# Altium PCB SDP_V2.0.PcbDoc (part 1 of 3)
Units mm, origin at the board's own origin, x right, y up, seen from the top; angles counter-clockwise.
Board outline 64 x 80 mm, 4 copper layers (Top Layer, Ground Plane, Power Plane, Bottom Layer), stack 1.466 mm thick; 154 components, 87 nets, 480 pads, 931 vias.
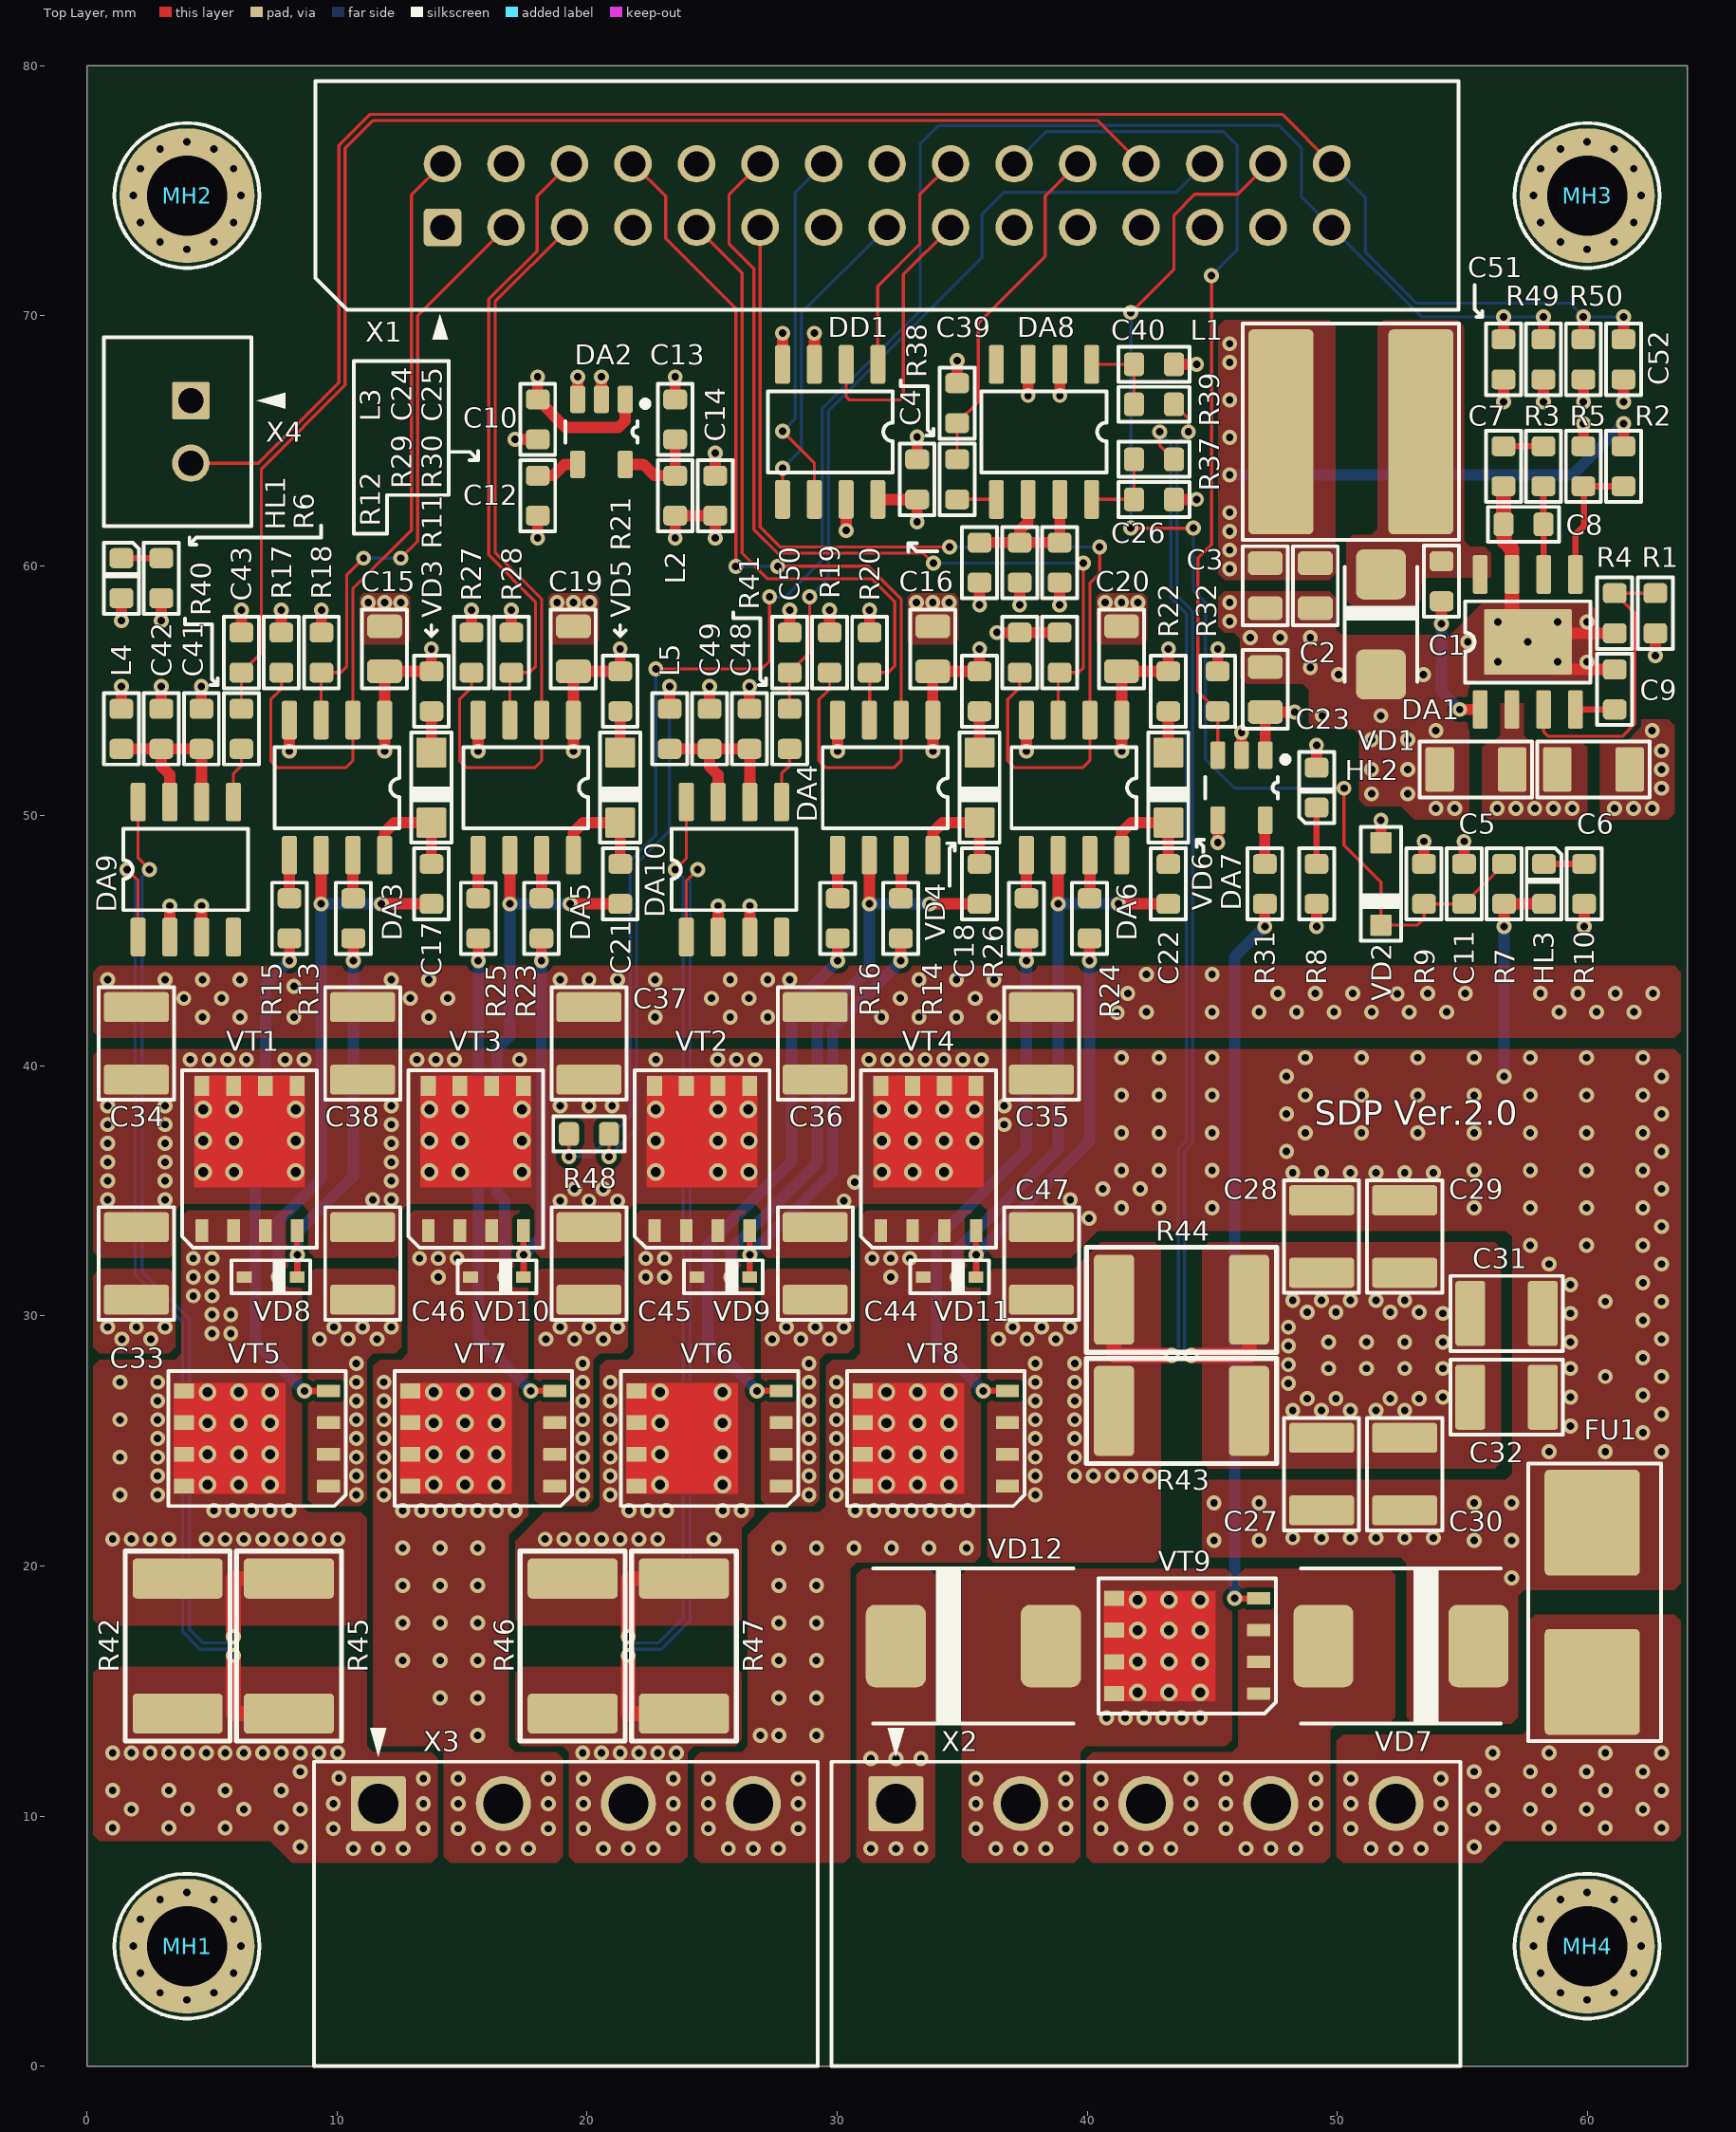
[diagram p0: Top Layer view]
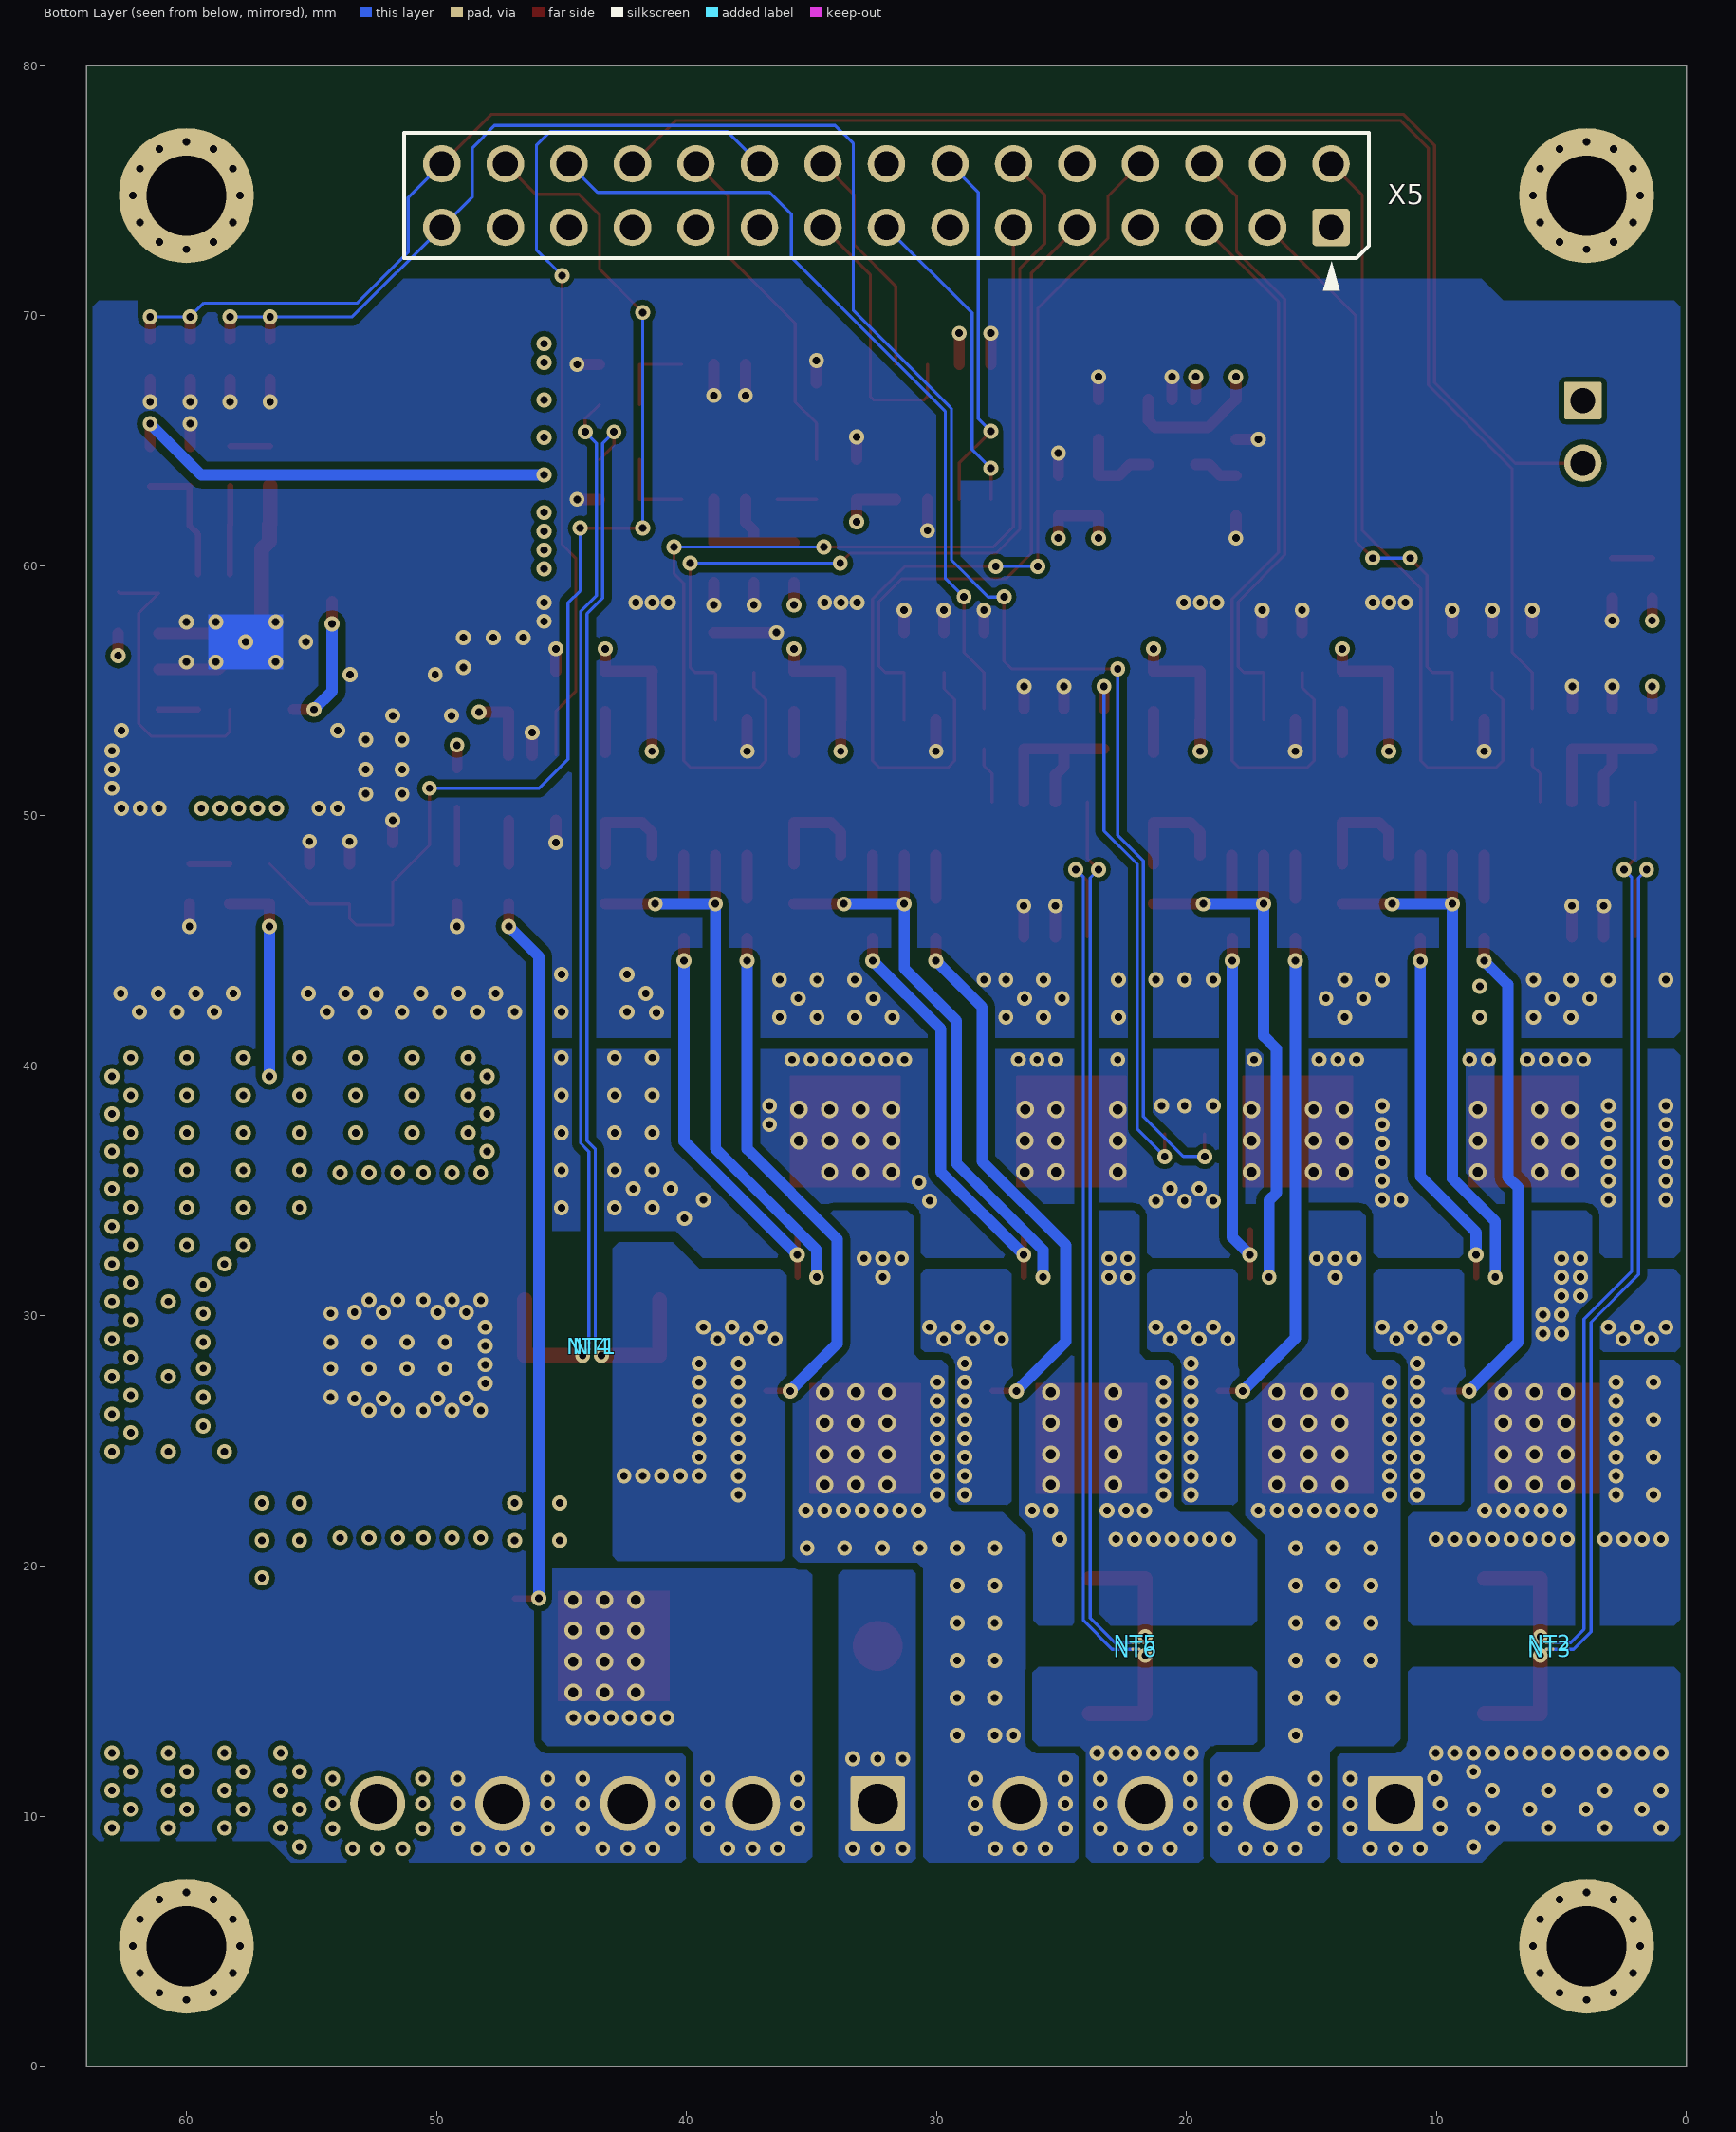
[diagram p1: Bottom Layer view, seen from below]
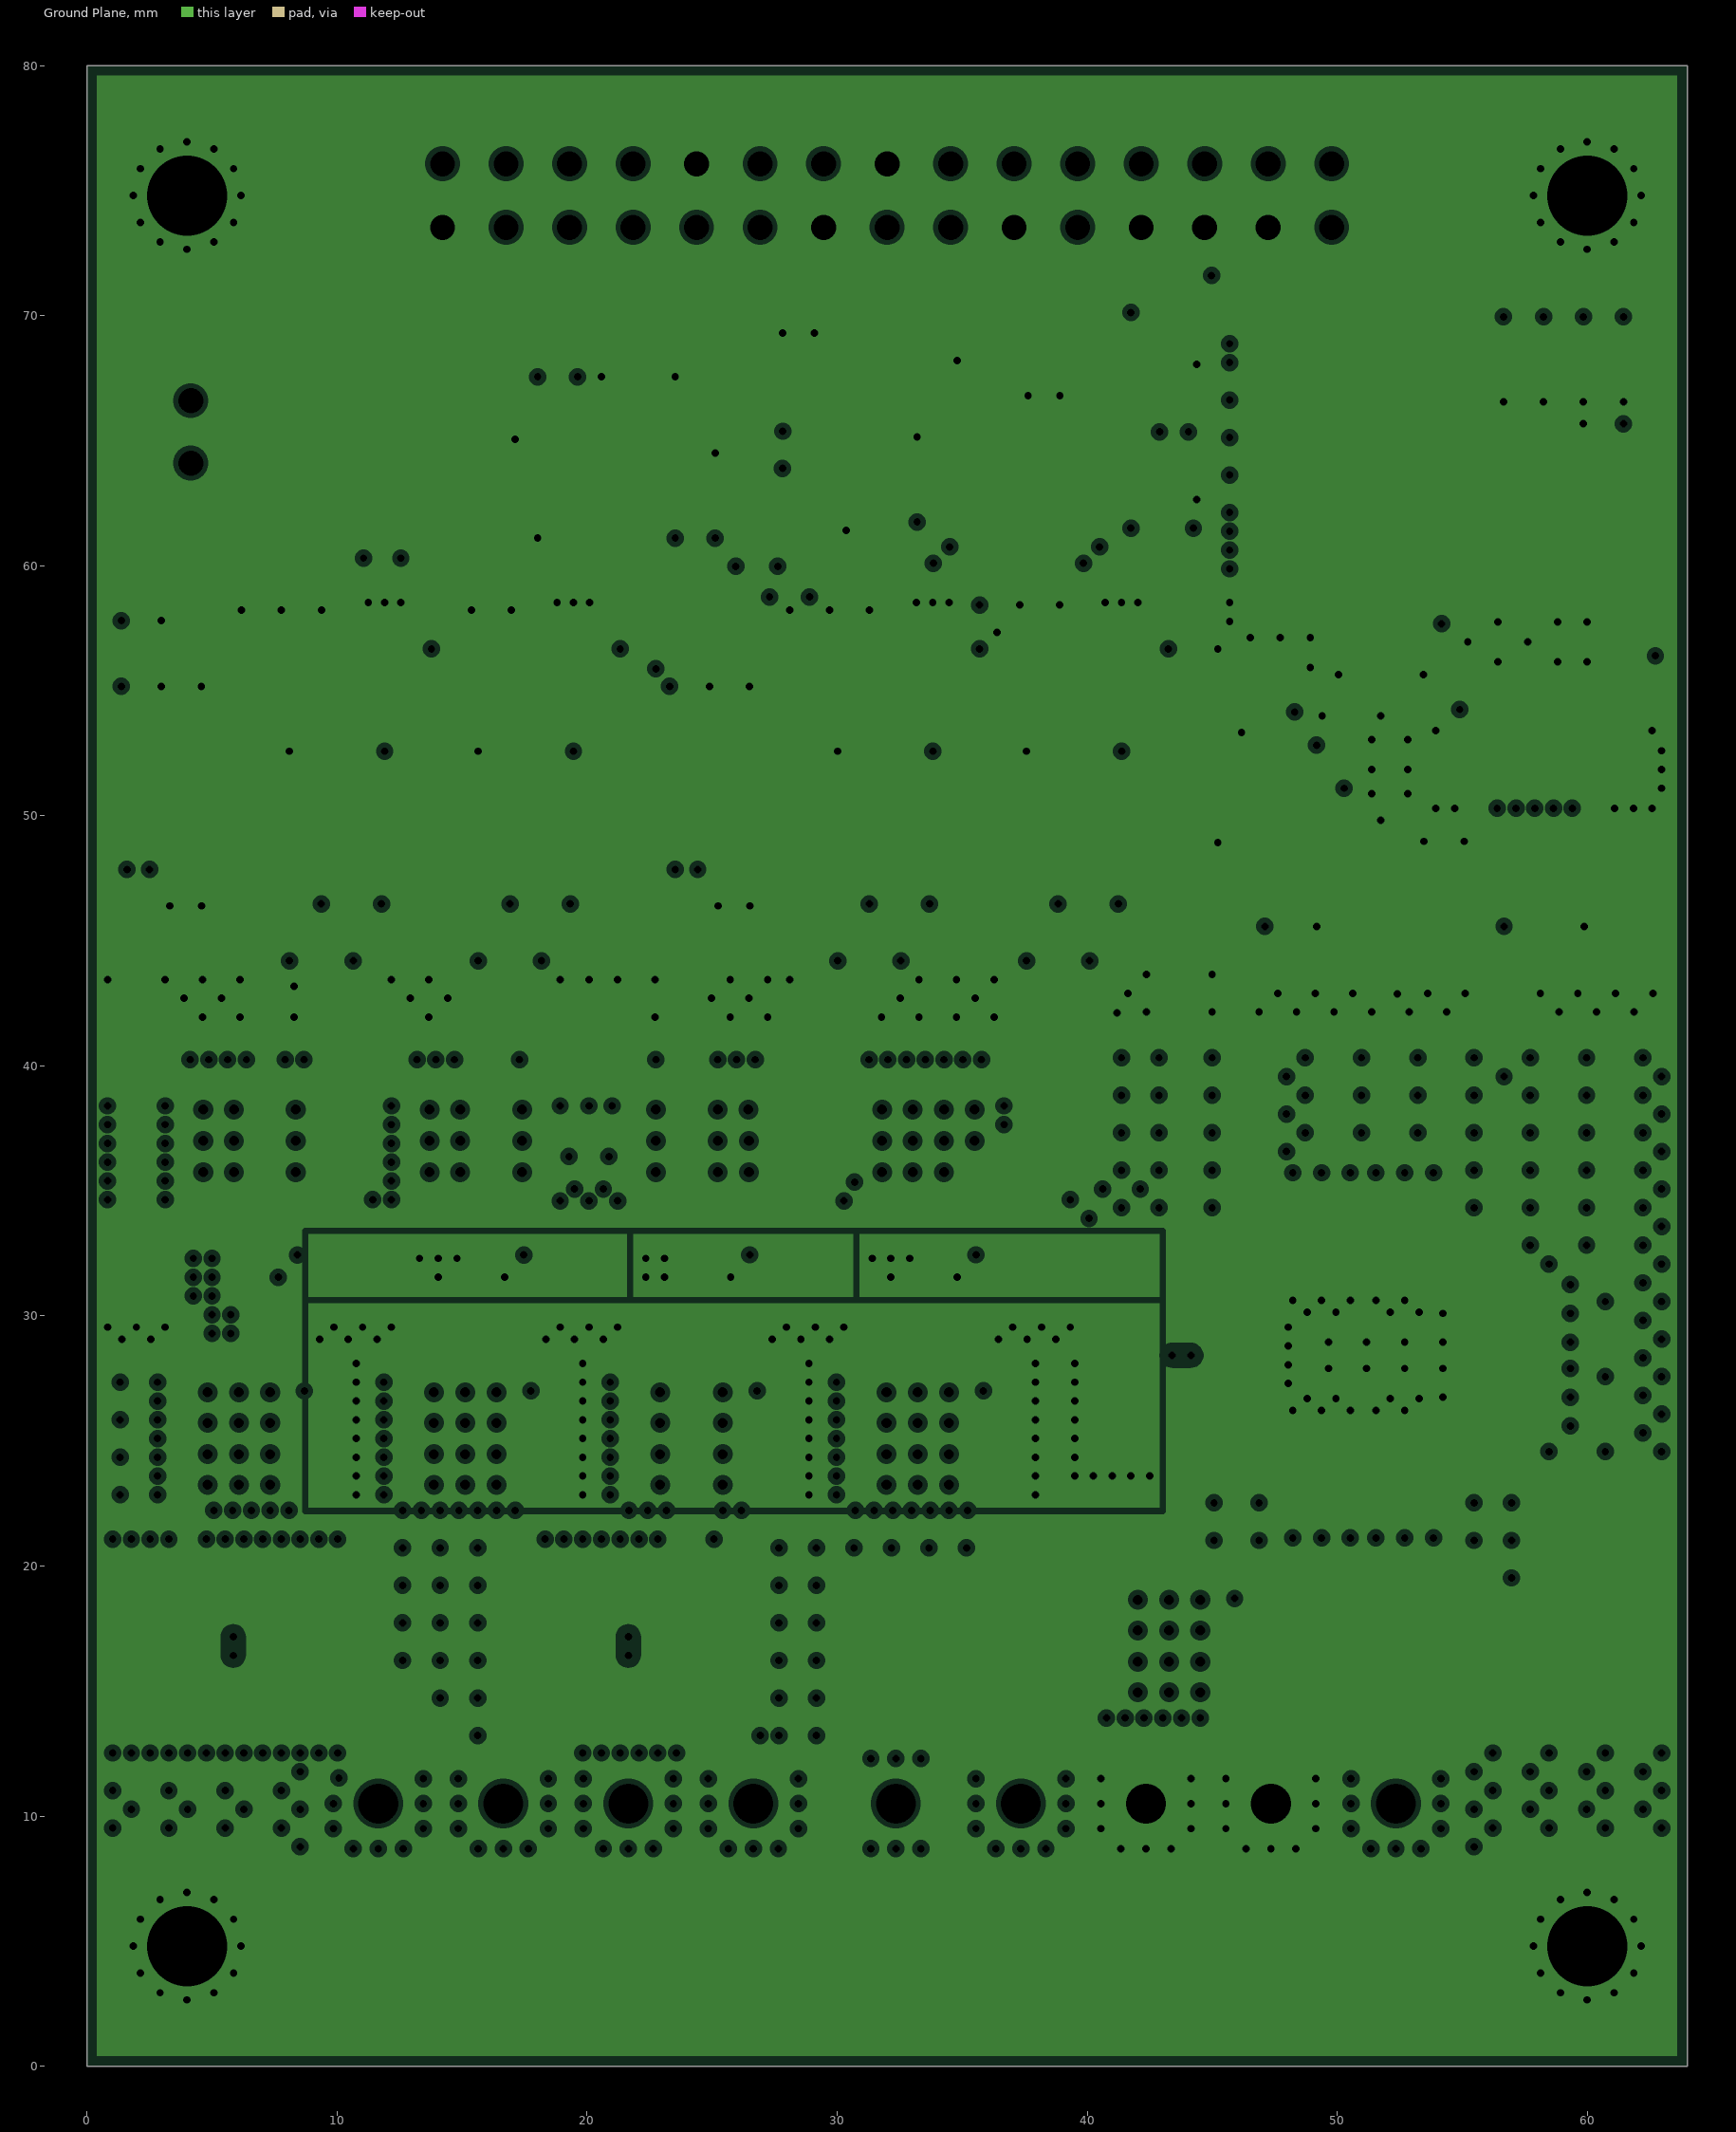
[diagram p2: Ground Plane, clearances drawn from the general rule]
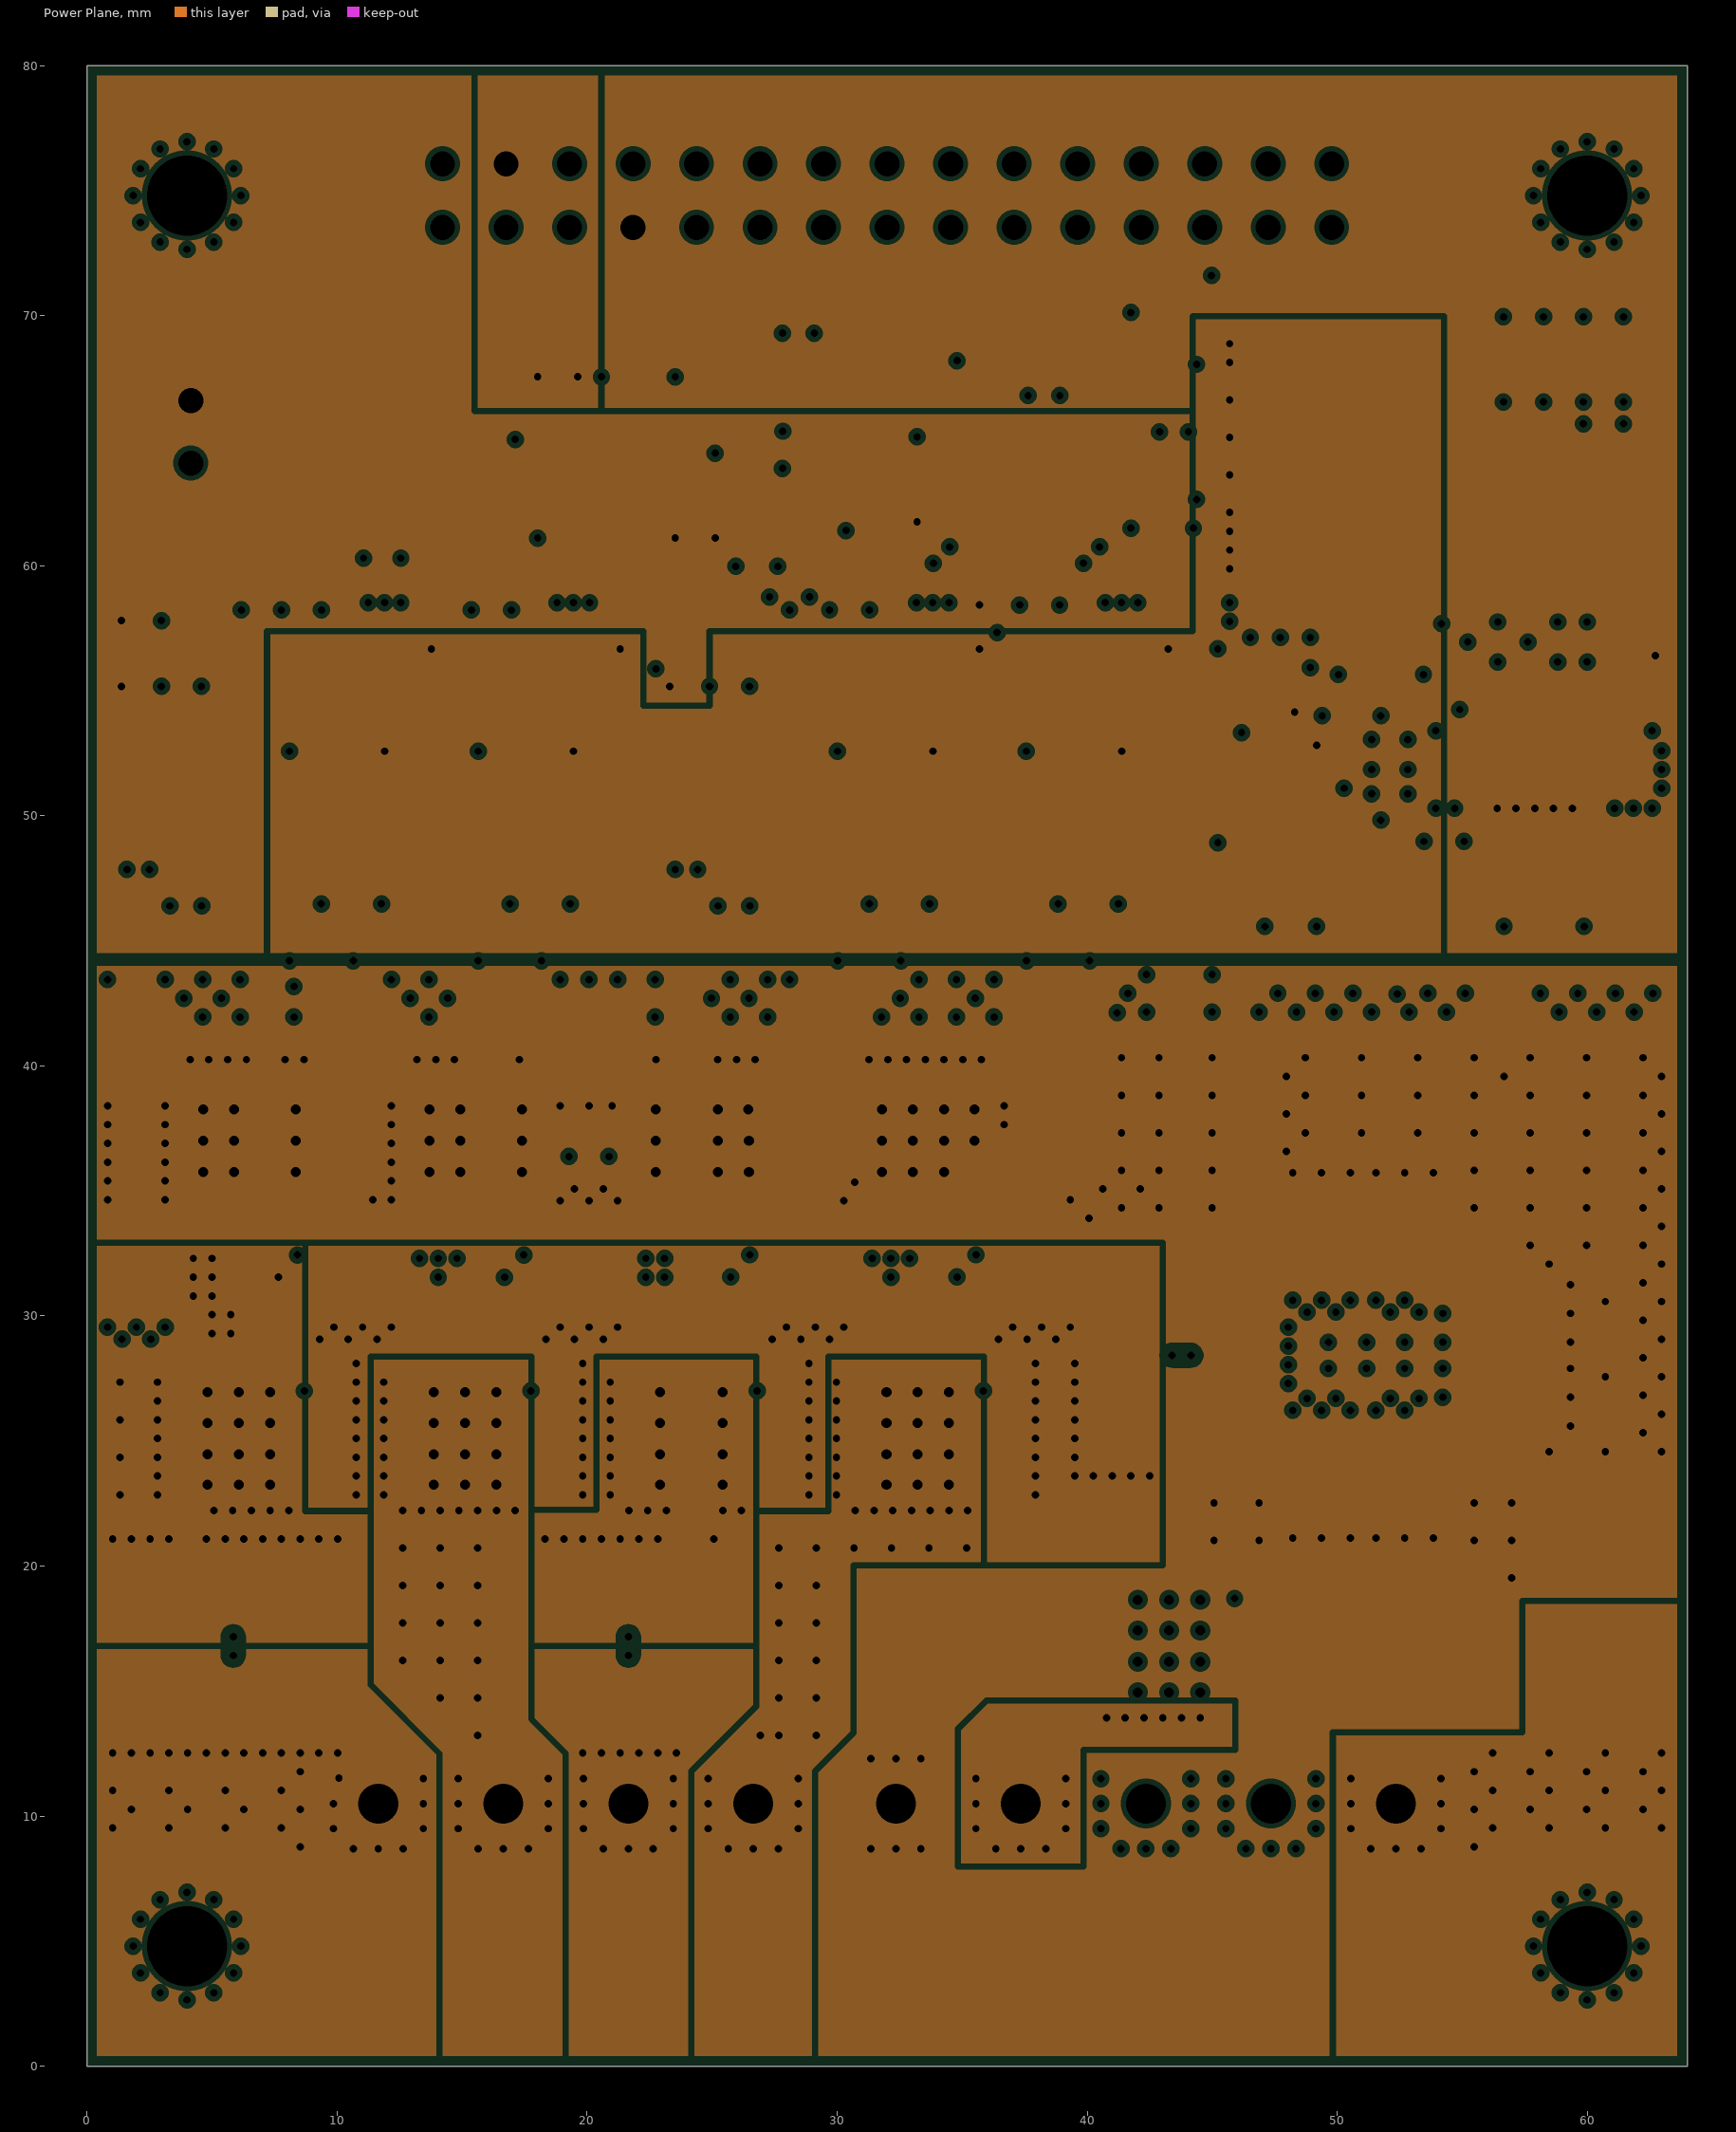
[diagram p3: Power Plane, clearances drawn from the general rule]
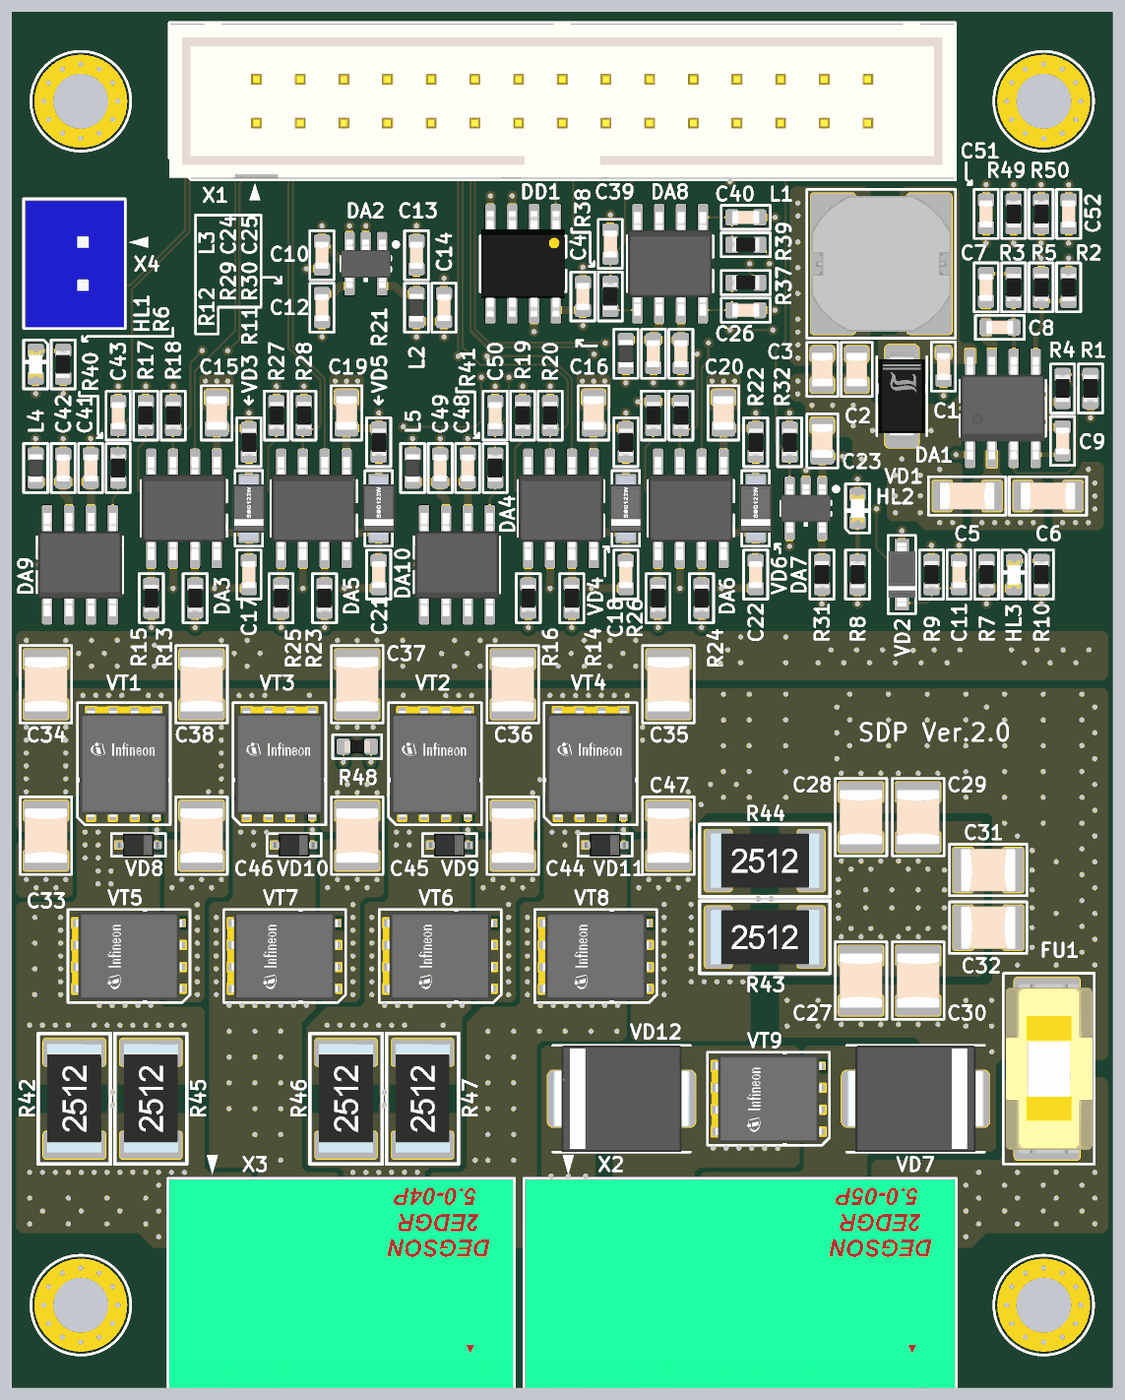
[diagram p5: 3D render of the assembled board from above, using the file's embedded part models]

## Layer stack, top to bottom
Top Solder: solder mask 0.01, Solder Resist, Dk 3.5
Top Layer: signal copper 0.018
Dielectric 1: prepreg 0.115, Dk 5.1
Ground Plane: plane copper 0.018, net (Multiple Nets)
Dielectric 3: core 1.164, Dk 4.6
Power Plane: plane copper 0.018, net (Multiple Nets)
Dielectric 2: prepreg 0.115, Dk 5.1
Bottom Layer: signal copper 0.018
Bottom Solder: solder mask 0.01, Solder Resist, Dk 3.5

## Board outline
0,0 64,0 64,80 0,80

## Design rules (kind name [scope] priority, off if disabled: settings)
Clearance ClearancePolyBot [InPolygon vs OnLayer('Bottom Layer')] p1: gap=0.3 ignorepadtopadclearanceinfootprint=FALSE except(0: Arc-Hole Track-Hole SMDPad-Hole THPad-Hole Via-Hole Fill-Hole Poly-Hole Region-Hole Text-Hole)
Clearance ClearancePoly [InPolygon] p2: gap=0.2 ignorepadtopadclearanceinfootprint=FALSE except(0: Arc-Hole Track-Hole SMDPad-Hole THPad-Hole Via-Hole Fill-Hole Poly-Hole Region-Hole Text-Hole)
Clearance [All] p3: gap=0.125 ignorepadtopadclearanceinfootprint=FALSE except(0: Arc-Hole Track-Hole SMDPad-Hole THPad-Hole Via-Hole Fill-Hole Poly-Hole Region-Hole Text-Hole)
ComponentClearance [All] p1: gap=0 collisioncheckmode=3 verticalgap=0 showdistances=FALSE
Height [All] p1: minheight=0 maxheight=100 prefheight=100
HoleSize [All] p1: absolutevalues=TRUE maxlimit=5 minlimit=0.3 maxpercent=80.000 minpercent=20.000
HoleToHoleClearance [All] p1: gap=0.2 allowstackedmicrovias=TRUE
MinimumAnnularRing MinimumAnnularRing_0.3 [Not IsVia] p1: minimumring=0.2
MinimumSolderMaskSliver [All] p1: minsoldermaskwidth=0.15
PlaneClearance [All] p1: clearance=0.2
PlaneConnect [All] p1: planeconnectstyle=Direct reliefexpansion=0.508 reliefentries=4 reliefconductorwidth=0.254 reliefairgap=0.254
PolygonConnect PolygonConnectVIA [IsVia] p1: connectstyle=Direct reliefconductorwidth=0.254 reliefentries=4 polygonreliefangle="90 Angle" airgapwidth=0.254
PolygonConnect [All] p2: connectstyle=Direct reliefconductorwidth=0.3 reliefentries=4 polygonreliefangle="90 Angle" airgapwidth=0.3
RoutingVias [IsVia] p1: holewidth=0.3 width=0.6 viastyle="Through Hole" minholewidth=0.3 minwidth=0.6 maxholewidth=2 maxwidth=1.5
SilkToSilkClearance [All] p1: silktosilkclearance=0
SilkToSolderMaskClearance [IsPad] p1: minsilkscreentomaskgap=0 clearancetoexposedcopper=TRUE
SolderMaskExpansion [All] p1: expansion=0.05 istentingtop=FALSE
Width Width_Arcs [IsArc] p1: maxlimit=0.254 minlimit=0.1 preferedwidth=0.254
Width [All] p2: maxlimit=10 minlimit=0.125 preferedwidth=0.125
21 further rules are at their usual default settings.

## Classes and differential pairs
component class MOSFETS: C24 C25 C26 C27 C28 C29 C30 C31 C32 C33 C34 C35 C36 C37 C38 C39 C40 C41 C42 C43 C44 C45 C46 C47 C48 C49 C50 C51 C52 DA8 DA9 DA10 FU1 L3 L4 L5 NT1 NT2 NT3 NT4 NT5 NT6 R37 R38 R39 R40 R41 R42 R43 R44 R45 R46 R47 R48 R49 R50 VD7 VD8 VD9 VD10 VD11 VD12 VT1 VT2 VT3 VT4 VT5 VT6 VT7 VT8 VT9 X2 X3 X4
component class DRIVERS: C1 C2 C3 C4 C5 C6 C7 C8 C9 C10 C11 C12 C13 C14 C15 C16 C17 C18 C19 C20 C21 C22 C23 DA1 DA2 DA3 DA4 DA5 DA6 DA7 DD1 HL1 HL2 HL3 L1 L2 MH1 MH2 MH3 MH4 R1 R2 R3 R4 R5 R6 R7 R8 R9 R10 R11 R12 R13 R14 R15 R16 R17 R18 R19 R20 R21 R22 R23 R24 R25 R26 R27 R28 R29 R30 R31 R32 VD1 VD2 VD3 VD4 VD5 VD6 X1 X5

## Components (designator, comment, footprint, x,y, rotation, side; value= is the part's Value field where it differs from the comment)
C1 "0.1uF" C0603N 54.175,59.375 r90 top
C2 "10uF" C0805N 49.125,59.2 r270 top
C3 "10uF" C0805N 47.125,59.2 r90 top
C4 "0.1uF" C0603N 33.2,63.45 r270 top
C5 "10uF" C1206N 55.55,51.85 r0 top
C6 "10uF" C1206N 60.25,51.85 r180 top
C7 "1.5nF" C0603N 56.65,63.975 r90 top
C8 "10pF" C0603N 57.45,61.65 r0 top
C9 "8.2nF" C0603N 61.1,55.05 r270 top
C10 "2.2uF" C0603N 18.025,65.85 r90 top
C11 "0.1uF" C0603N 55.075,47.275 r270 top
C12 "10nF" C0603N 18.025,62.8 r90 top
C13 "2.2uF" C0603N 23.525,65.85 r270 top
C14 "2.2uF" C0603N 25.125,62.8 r270 top
C15 "1uF" C0805N 11.9,56.675 r90 top
C16 "1uF" C0805N 33.825,56.675 r90 top
C17 "0.1uF" C0603N 13.775,47.275 r270 top
C18 "0.1uF" C0603N 35.7,47.275 r270 top
C19 "1uF" C0805N 19.45,56.675 r90 top
C20 "1uF" C0805N 41.375,56.675 r90 top
C21 "0.1uF" C0603N 21.325,47.275 r270 top
C22 "0.1uF" C0603N 43.25,47.275 r270 top
C23 "1uF" C0805N 47.125,55.05 r90 top
C24 "0.1uF" C0603N 37.3,60.125 r90 top
C25 "10nF" C0603N 38.9,60.125 r90 top
C26 "100pF" C0603N 42.675,62.65 r0 top
C27 "4.7uF" C1210N 49.375,23.675 r270 top
C28 "4.7uF" C1210N 49.375,33.175 r90 top
C29 "4.7uF" C1210N 52.7,33.175 r90 top
C30 "4.7uF" C1210N 52.7,23.675 r270 top
C31 "4.7uF" C1210N 56.775,30.1 r0 top
C32 "4.7uF" C1210N 56.775,26.75 r0 top
C33 "4.7uF" C1210N 1.975,32.1 r90 top
C34 "4.7uF" C1210N 1.975,40.9 r270 top
C35 "4.7uF" C1210N 38.175,40.9 r270 top
C36 "4.7uF" C1210N 29.125,40.9 r270 top
C37 "4.7uF" C1210N 20.075,40.9 r270 top
C38 "4.7uF" C1210N 11.025,40.9 r270 top
C39 "2.2nF" C0603N 34.8,66.5 r270 top
C40 "100pF" C0603N 42.675,68.05 r180 top
C41 "0.1uF" C0603N 4.575,53.475 r270 top
C42 "10nF" C0603N 2.975,53.475 r270 top
C43 "2.2nF" C0603N 6.175,56.525 r270 top
C44 "4.7uF" C1210N 29.125,32.1 r90 top
C45 "4.7uF" C1210N 20.075,32.1 r90 top
C46 "4.7uF" C1210N 11.025,32.1 r90 top
C47 "4.7uF" C1210N 38.175,32.1 r90 top
C48 "0.1uF" C0603N 26.5,53.475 r270 top
C49 "10nF" C0603N 24.9,53.475 r270 top
C50 "2.2nF" C0603N 28.1,56.525 r270 top
C51 "0.1uF" C0603N 56.65,68.25 r270 top
C52 "0.1uF" C0603N 61.45,68.25 r270 top
DA1 "TPS54332DDAR" SOIC8-EP 57.625,56.95 r90 top
DA2 "LP2985-33DBVR" "DBV0005A (SOT23-5)" 20.575,65.35 r180 top
DA3 "LM5109BMA/NOPB" D0008A 10,51.125 r270 top
DA4 "LM5109BMA/NOPB" D0008A 31.925,51.125 r270 top
DA5 "LM5109BMA/NOPB" D0008A 17.55,51.125 r270 top
DA6 "LM5109BMA/NOPB" D0008A 39.475,51.125 r270 top
DA7 "UCC27517DBVT" "DBV0005A (SOT23-5)" 46.175,51.125 r180 top
DA8 "INA240A1D" D0008A 38.275,65.35 r270 top
DA9 "INA240A1D" D0008A 3.95,47.85 r90 top
DA10 "INA240A1D" D0008A 25.875,47.85 r90 top
DD1 "M24C01-WMN6P" SOIC8 29.725,65.35 r270 top
FU1 "10A" 0154 60.3,18.55 r270 top
HL1 "GNL-0603GC" LED0603 1.375,59.5 r270 top
HL2 "GNL-0603GC" LED0603 49.175,51.125 r90 top
HL3 "GNL-0603GC" LED0603 58.275,47.275 r270 top
L1 "15uH" SRN8040 50.55,65.35 r180 top
L2 "600 @ 100MHz" FB0603N 23.525,62.8 r270 top
L3 "600 @ 100MHz" FB0603N 35.7,60.125 r90 top
L4 "600 @ 100MHz" FB0603N 1.375,53.475 r270 top
L5 "600 @ 100MHz" FB0603N 23.3,53.475 r270 top
MH1 "MNT_HOLE_PL" MH_3.2_5.4_PLATED_VIA 4,4.8 r180 top
MH2 "MNT_HOLE_PL" MH_3.2_5.4_PLATED_VIA 4,74.8 r180 top
MH3 "MNT_HOLE_PL" MH_3.2_5.4_PLATED_VIA 60,74.8 r180 top
MH4 "MNT_HOLE_PL" MH_3.2_5.4_PLATED_VIA 60,4.8 r180 top
NT1 "NET_TIE" NT_0.125_0.375 43.65,28.8 r270 bottom net-tie
NT2 "NET_TIE" NT_0.125_0.375 5.475,16.925 r180 bottom net-tie
NT3 "NET_TIE" NT_0.125_0.375 5.475,16.675 r0 bottom net-tie
NT4 "NET_TIE" NT_0.125_0.375 43.9,28.8 r270 bottom net-tie
NT5 "NET_TIE" NT_0.125_0.375 22.025,16.925 r0 bottom net-tie
NT6 "NET_TIE" NT_0.125_0.375 22.025,16.675 r180 bottom net-tie
R1 "332k" R0603N 62.725,58.1 r90 top
R2 "10.2k" R0603N 61.45,63.975 r270 top
R3 "9.31k" R0603N 58.25,63.975 r90 top
R4 "31.6k" R0603N 61.1,58.1 r270 top
R5 "732" R0603N 59.85,63.975 r90 top
R6 "1k" R0603N 2.975,59.5 r270 top
R7 "22k" R0603N 56.675,47.275 r90 top
R8 "10k" R0603N 49.175,47.275 r270 top
R9 "1k" R0603N 53.475,47.275 r90 top
R10 "22k" R0603N 59.875,47.275 r270 top
R11 "2.2" R0603N 13.775,54.975 r90 top
R12 "2.2" R0603N 35.7,54.975 r90 top
R13 "2.2" R0603N 10.65,45.9 r90 top
R14 "2.2" R0603N 32.55,45.9 r90 top
R15 "2.2" R0603N 8.1,45.9 r90 top
R16 "2.2" R0603N 30.025,45.9 r90 top
R17 "10k" R0603N 7.775,56.525 r90 top
R18 "10k" R0603N 9.375,56.525 r90 top
R19 "10k" R0603N 29.7,56.525 r90 top
R20 "10k" R0603N 31.3,56.525 r90 top
R21 "2.2" R0603N 21.325,54.975 r90 top
R22 "2.2" R0603N 43.25,54.975 r90 top
R23 "2.2" R0603N 18.175,45.9 r90 top
R24 "2.2" R0603N 40.1,45.9 r90 top
R25 "2.2" R0603N 15.65,45.9 r90 top
R26 "2.2" R0603N 37.575,45.9 r90 top
R27 "10k" R0603N 15.375,56.525 r90 top
R28 "10k" R0603N 16.975,56.525 r90 top
R29 "10k" R0603N 37.3,56.525 r90 top
R30 "10k" R0603N 38.9,56.525 r90 top
R31 "2.2" R0603N 47.106,47.275 r90 top
R32 "10k" R0603N 45.225,54.975 r90 top
R37 "100" R0603N 42.675,64.25 r0 top
R38 "1k" R0603N 34.8,63.45 r270 top
R39 "100" R0603N 42.675,66.45 r0 top
R40 "1k" R0603N 6.175,53.475 r270 top
R41 "1k" R0603N 28.1,53.475 r270 top
R42 "15m" R2512N 3.625,16.8 r90 top
R43 "15m" R2512N 43.775,26.2 r0 top
R44 "15m" R2512N 43.775,30.65 r0 top
R45 "15m" R2512N 8.075,16.8 r90 top
R46 "15m" R2512N 19.425,16.8 r90 top
R47 "15m" R2512N 23.875,16.8 r90 top
R48 "10k" RT0603N 20.075,37.275 r180 top
R49 "10k" R0603N 58.25,68.25 r270 top
R50 "10k" R0603N 59.85,68.25 r270 top
VD1 "B340A-13-F" SMA 51.75,57.65 r270 top
VD2 "MMSZ5230B-7-F" SOD123 51.75,47.275 r90 top
VD3 "PMEG10010ELRX" SOD123W 13.775,51.125 r90 top
VD4 "PMEG10010ELRX" SOD123W 35.7,51.125 r90 top
VD5 "PMEG10010ELRX" SOD123W 21.325,51.125 r90 top
VD6 "PMEG10010ELRX" SOD123W 43.25,51.125 r90 top
VD7 "SM15T68A" SMC 52.55,16.8 r180 top
VD8 "BZX384-B13,115" SOD323 7.35,31.55 r180 top
VD9 "BZX384-B13,115" SOD323 25.45,31.55 r180 top
VD10 "BZX384-B13,115" SOD323 16.4,31.55 r180 top
VD11 "BZX384-B13,115" SOD323 34.5,31.55 r180 top
VD12 "B3100-13-F" SMC 35.45,16.8 r0 top
VT1 "BSC030N08NS5ATMA1" PG-TDSON-8 6.5,36.275 r0 top
VT2 "BSC030N08NS5ATMA1" PG-TDSON-8 24.6,36.275 r0 top
VT3 "BSC030N08NS5ATMA1" PG-TDSON-8 15.55,36.275 r0 top
VT4 "BSC030N08NS5ATMA1" PG-TDSON-8 33.65,36.275 r0 top
VT5 "BSC030N08NS5ATMA1" PG-TDSON-8 6.8,25.1 r90 top
VT6 "BSC030N08NS5ATMA1" PG-TDSON-8 24.9,25.1 r90 top
VT7 "BSC030N08NS5ATMA1" PG-TDSON-8 15.85,25.1 r90 top
VT8 "BSC030N08NS5ATMA1" PG-TDSON-8 33.95,25.1 r90 top
VT9 "BSC030N08NS5ATMA1" PG-TDSON-8 44,16.8 r90 top
X1 "DS1013-30S" 2.54_2X15_HEADER_BOX 32,74.8 r0 top locked
X2 "2EDGR-5.0-05P-14-00A(H)" 2EDGR-5.0-05P-14-00A(H) 42.35,6.05 r0 top locked
X3 "2EDGR-5.0-04P-14-00A(H)" 2EDGR-5.0-04P-14-00A(H) 19.15,6.05 r0 top locked
X4 "B2B-XH-A(LF)(SN)" B2B-XH-A 4.15,65.35 r270 top
X5 "DS1021-2X15SF11-B" 2.54_2X15_HEADER 32,74.8 r0 bottom locked

## Footprints (in the part's own frame and the unit in brackets; to place one, negate y for a bottom-side part, rotate by r counter-clockwise, add the part's x,y. Pads: shape width x height; smd on the part's side, far side on the other; paste and mask are expansions set on the pad)
2.54_2X15_HEADER [mm] "30 pin, 2x15, 2.54 mm pitch Male Header"
  rrect20% 1.5x1.5 hole 1: 1(-17.78,1.27)
  round 1.5 hole 1: 2(-17.78,-1.27) 3(-15.24,1.27) 4(-15.24,-1.27) 5(-12.7,1.27) 6(-12.7,-1.27) 7(-10.16,1.27) 8(-10.16,-1.27) 9(-7.62,1.27) 10(-7.62,-1.27) 11(-5.08,1.27) 12(-5.08,-1.27) 13(-2.54,1.27) 14(-2.54,-1.27) 15(0,1.27) 16(0,-1.27) 17(2.54,1.27) 18(2.54,-1.27) 19(5.08,1.27) 20(5.08,-1.27) 21(7.62,1.27) 22(7.62,-1.27) 23(10.16,1.27) 24(10.16,-1.27) 25(12.7,1.27) 26(12.7,-1.27) 27(15.24,1.27) 28(15.24,-1.27) 29(17.78,1.27) 30(17.78,-1.27)
  silkscreen extent -19.3,-2.5 19.3,3.79, body extent -19.05,-2.54 19.05,2.54, height 8.57
2.54_2X15_HEADER_BOX [mm] "30 pin, 2x15, 2.54 mm pitch Male Box Header"
  rrect20% 1.5x1.5 hole 1: 1(-17.78,-1.27)
  round 1.5 hole 1: 2(-17.78,1.27) 3(-15.24,-1.27) 4(-15.24,1.27) 5(-12.7,-1.27) 6(-12.7,1.27) 7(-10.16,-1.27) 8(-10.16,1.27) 9(-7.62,-1.27) 10(-7.62,1.27) 11(-5.08,-1.27) 12(-5.08,1.27) 13(-2.54,-1.27) 14(-2.54,1.27) 15(0,-1.27) 16(0,1.27) 17(2.54,-1.27) 18(2.54,1.27) 19(5.08,-1.27) 20(5.08,1.27) 21(7.62,-1.27) 22(7.62,1.27) 23(10.16,-1.27) 24(10.16,1.27) 25(12.7,-1.27) 26(12.7,1.27) 27(15.24,-1.27) 28(15.24,1.27) 29(17.78,-1.27) 30(17.78,1.27)
  silkscreen extent -22.86,-5.75 22.86,4.57, body extent -22.86,-4.45 22.86,4.65, height 8.9
2EDGR-5.0-04P-14-00A(H) [mm] "Pluggable terminal block, 5.0mm pitch, angled 90, 4 position"
  rrect10% 2.2x2.2 hole 1.6: 1(-7.5,4.45)
  round 2.2 hole 1.6: 2(-2.5,4.45) 3(2.5,4.45) 4(7.5,4.45)
  silkscreen extent -10.07,-6.05 10.08,7.47, body extent -10,-6.05 10,6.05, height 8.2
2EDGR-5.0-05P-14-00A(H) [mm] "Pluggable terminal block, 5.0mm pitch, angled 90, 5 position"
  rrect10% 2.2x2.2 hole 1.6: 1(-10,4.45)
  round 2.2 hole 1.6: 2(-5,4.45) 3(0,4.45) 4(5,4.45) 5(10,4.45)
  silkscreen extent -12.57,-6.05 12.58,7.47, body extent -12.5,-6.05 12.5,6.05, height 8.2
0154 [mm] "OMNI-BLOCK 154 Fuse and Holder Assembly"
  rrect10% 4.24x3.81 smd: 1(-3.185,-0.1) 2(3.185,-0.1)
  silkscreen extent -5.55,-2.65 5.55,2.65, body extent -4.92,-2.5 4.91,2.53, height 3.81
B2B-XH-A [mm] "Connector Header Through Hole 2 position 0.098\" (2.50mm)"
  rrect10% 1.5x1.5 hole 1: 1(-1.25,0)
  round 1.5 hole 1: 2(1.25,0)
  silkscreen extent -3.77,-3.47 3.77,3.77, body extent -3.7,-3.4 3.7,2.35, height 7
C0603N [mm]
  rrect40% 0.8x0.95 smd: 1(-0.8,0) 2(0.8,0)
  silkscreen extent -1.43,-0.7 1.43,0.7, body extent -0.8,-0.4 0.8,0.4, height 0.81
C0805N [mm]
  rrect40% 0.95x1.4 smd: 1(-0.9,0) 2(0.9,0)
  silkscreen extent -1.58,-0.9 1.58,0.9, body extent -1,-0.62 1,0.63, height 1.26
C1206N [mm]
  rrect20% 1.15x1.8 smd: 1(-1.45,0) 2(1.45,0)
  silkscreen extent -2.25,-1.12 2.25,1.12, body extent -1.6,-0.8 1.6,0.8, height 1.61
C1210N [mm]
  rrect20% 1.2x2.6 smd: 1(-1.45,0) 2(1.45,0)
  silkscreen extent -2.25,-1.5 2.25,1.5, body extent -1.6,-1.25 1.6,1.25, height 2.51
D0008A [mm] "SOIC8 - 1.75 mm max height"
  rrect30% 1.55x0.6 smd: 1(-2.7,1.905) 2(-2.7,0.635) 3(-2.7,-0.635) 4(-2.7,-1.905) 5(2.7,-1.905) 6(2.7,-0.635) 7(2.7,0.635) 8(2.7,1.905)
  silkscreen extent -1.63,-2.5 1.63,2.5, body extent -3.01,-2.45 3.01,2.45, height 1.63
"DBV0005A (SOT23-5)" [mm] "SOT-23, 5 Lead, 1.45mm max height"
  rrect30% 0.6x1.1 smd: 1(-0.95,-1.3) 2(0,-1.3) 3(0.95,-1.3) 4(0.95,1.3) 5(-0.95,1.3)
  silkscreen extent -1.87,-1.24 1.45,0.43, body extent -1.45,-1.4 1.45,1.4, height 1.2
FB0603N [mm] "Ferrite Bead 0603"
  rrect40% 0.8x0.95 smd: 1(-0.8,0) 2(0.8,0)
  silkscreen extent -1.43,-0.7 1.43,0.7, body extent -0.8,-0.4 0.8,0.4, height 0.8
LED0603 [mm] "LED SMD 0603"
  rrect40% 0.8x0.95 smd: 1(-0.8,0) 2(0.8,0)
  silkscreen extent -1.43,-0.7 1.43,0.7, body extent -0.8,-0.4 0.8,0.4, height 0.7
MH_3.2_5.4_PLATED_VIA [mm] "Mounting Hole, 3.2mm/5.4mm dia., Plated, with Via Stiching"
  round 5.4 hole 3.2: 1(0,0)
  silkscreen extent -2.9,-2.9 2.9,2.9
NT_0.125_0.375 [mm] "Net Tie, 0.125mm width, 0.375mm total length"
  round 0.125 smd paste-20 mask-20: 1(-0.125,0) 2(0.125,0)
  Top Layer region: -0.125,0.062 0.125,0.062 0.125,-0.062 -0.125,-0.062
PG-TDSON-8 [mm] "PG-TDSON-8 Package"
  rrect10% 0.5x0.925 smd paste-0.05: 1(-1.905,-2.863) 2(-0.635,-2.863) 3(0.635,-2.863) 4(1.905,-2.863)
  rrect10% 0.6x0.8 smd paste-0.05: 5(1.905,2.925) 6(0.635,2.925) 7(-0.635,2.925) 8(-1.905,2.925)
  Top Layer region: -2.18,-1.13 -2.19,-1.128 -2.198,-1.123 -2.203,-1.115 -2.205,-1.105 -2.205,-1.105 -2.205,2.525 2.205,2.525 2.205,-1.105 2.203,-1.115 2.198,-1.123 2.19,-1.128 2.18,-1.13 2.18,-1.13
  Top Layer region: -2.18,-1.13 -2.19,-1.128 -2.198,-1.123 -2.203,-1.115 -2.205,-1.105 -2.205,-1.105 -2.205,3.3 -2.203,3.31 -2.198,3.318 -2.19,3.323 -2.18,3.325 -2.18,3.325 2.18,3.325 2.19,3.323 2.198,3.318 2.203,3.31 2.205,3.3 2.205,3.3 2.205,-1.105 2.203,-1.115 2.198,-1.123 2.19,-1.128 2.18,-1.13 2.18,-1.13
  silkscreen extent -2.7,-3.55 2.7,3.55, body extent -2.7,-3.07 2.69,3.07, height 1.01
R0603N [mm]
  rrect40% 0.8x0.95 smd: 1(-0.8,0) 2(0.8,0)
  silkscreen extent -1.43,-0.7 1.43,0.7, body extent -0.8,-0.4 0.8,0.4, height 0.45
R2512N [mm] "RCWE2512R120FKEA"
  rrect20% 1.6x3.6 smd: 1(-2.7,0) 2(2.7,0)
  silkscreen extent -3.8,-2.1 3.8,2.1, body extent -3.13,-1.58 3.17,1.58, height 0.82
RT0603N [mm] "NTC Thermistor 0603"
  rrect40% 0.8x0.95 smd: 1(-0.8,0) 2(0.8,0)
  silkscreen extent -1.43,-0.7 1.43,0.7, body extent -0.8,-0.4 0.8,0.4, height 0.8
SMA [mm] "SMA Package"
  rrect30% 2x2 smd: 1(-2,0) 2(2,0)
  silkscreen extent -2.3,-1.45 2.3,1.45, body extent -2.56,-1.35 2.56,1.35, height 1.96
SMC [mm] "SMC Package"
  rrect30% 2.4x3.3 smd: 1(-3.1,0) 2(3.1,0)
  silkscreen extent -4,-3.1 4,3.1, body extent -4,-3.1 4,3.1, height 2.5
SOD123 [mm] "SOD?123 CASE 425?04 ISSUE G"
  rrect10% 0.85x0.85 smd: 1(-1.65,0) 2(1.65,0)
  silkscreen extent -2.27,-0.8 2.27,0.8, body extent -1.85,-0.77 1.85,0.78, height 1.25
SOD123W [mm] "SOD123W (CFP3) Package"
  rrect10% 1.2x1.2 smd: 1(-1.4,0) 2(1.4,0)
  silkscreen extent -2.2,-0.8 2.2,0.8, body extent -1.85,-0.95 1.85,0.95, height 1.1
SOD323 [mm] "SOD323 Package"
  rrect10% 0.59x0.45 smd: 1(-1.06,0) 2(1.06,0)
  silkscreen extent -1.58,-0.67 1.58,0.68, body extent -1.3,-0.67 1.3,0.68, height 1.1
SOIC8 [mm] "SOIC8 - 1.75 mm max height"
  rrect30% 1.55x0.6 smd: 1(-2.7,1.905) 2(-2.7,0.635) 3(-2.7,-0.635) 4(-2.7,-1.905) 5(2.7,-1.905) 6(2.7,-0.635) 7(2.7,0.635) 8(2.7,1.905)
  silkscreen extent -1.63,-2.5 1.63,2.5, body extent -3.07,-2.44 3.07,2.45, height 1.73
SOIC8-EP [mm] "SOIC8 with Exposed Pad"
  rrect30% 1.55x0.6 smd: 1(-2.7,1.905) 2(-2.7,0.635) 3(-2.7,-0.635) 4(-2.7,-1.905) 5(2.7,-1.905) 6(2.7,-0.635) 7(2.7,0.635) 8(2.7,1.905)
  rrect5% 2.62x3.51 smd: 9(0,0)
  silkscreen extent -1.63,-2.5 1.63,2.5, body extent -2.98,-2.45 2.98,2.45, height 1.51
SRN8040 [mm] "SRN8040 Series - Semi-shielded Power Inductors"
  rrect15% 2.6x8.2 smd: 1(-2.8,0) 2(2.8,0)
  silkscreen extent -4.33,-4.33 4.33,4.33, body extent -4.07,-3.95 4.08,3.95, height 4

## Part data
C1 C4 C11 C17 C18 C21 C22 C24 C41 C48 C51 C52: library part CL10B104KB8NNNC, "Конденсатор", Артикул=CL10B104KB8NNNC, Вид монтажа=SMD, Диэлектрик=X7R, Корпус="0603 (1608 Metric)", Напряжение=50V, Номинал=0.1uF, Описание="0.1 µF ±10% 50V Ceramic Capacitor X7R 0603 (1608 Metric)", Производитель="Samsung Electro-Mechanics", Строка для документации=https://mm.digikey.com/Volume0/opasdata/d220001/medias/docus/609/CL10B104KB8NNNC_Spec.pdf, Температурный диапазон="-55°C ~ 125°C", Тип элемента=Конденсатор, Точность=10%
C2 C3: library part CL21A106KAYNNNE, "Конденсатор", Артикул=CL21A106KAYNNNE, Вид монтажа=SMD, Диэлектрик=X5R, Корпус="0805 (2012 Metric)", Напряжение=25V, Номинал=10uF, Описание="10 µF ±10% 25V Ceramic Capacitor X5R 0805 (2012 Metric)", Производитель="Samsung Electro-Mechanics", Строка для документации=https://mm.digikey.com/Volume0/opasdata/d220001/medias/docus/5545/CL21A106KAYNNNE%20Spec.pdf, Температурный диапазон="-55°C ~ 85°C", Тип элемента=Конденсатор, Точность=10%
C5 C6: library part CL31B106KBHNNNE, "Конденсатор", Артикул=CL31B106KBHNNNE, Вид монтажа=SMD, Диэлектрик=X7R, Корпус="1206 (3216 Metric)", Напряжение=50V, Номинал=10uF, Описание="10 µF ±10% 50V Ceramic Capacitor X7R 1206 (3216 Metric)", Производитель="Samsung Electro-Mechanics", Строка для документации=https://mm.digikey.com/Volume0/opasdata/d220001/medias/docus/41/CL31B106KBHNNNE_Spec.pdf, Температурный диапазон="-55°C ~ 125°C", Тип элемента=Конденсатор, Точность=10%
C7: library part CL10B152KB8WPNC, "Конденсатор", Артикул=CL10B152KB8WPNC, Вид монтажа=SMD, Диэлектрик=X7R, Корпус="0603 (1608 Metric)", Напряжение=50V, Номинал=1.5nF, Описание="1500 pF ±10% 50V Ceramic Capacitor X7R 0603 (1608 Metric)", Производитель="Samsung Electro-Mechanics", Строка для документации=https://mm.digikey.com/Volume0/opasdata/d220001/medias/docus/41/CL10B152KB8WPNC_Spec.pdf, Температурный диапазон="-55°C ~ 125°C", Тип элемента=Конденсатор, Точность=10%
C8: library part CL10C100CB8NNNC, "Конденсатор", Артикул=CL10C100CB8NNNC, Вид монтажа=SMD, Диэлектрик=NP0, Корпус="0603 (1608 Metric)", Напряжение=50V, Номинал=10pF, Описание="10 pF ±0.25pF 50V Ceramic Capacitor C0G, NP0 0603 (1608 Metric)", Производитель="Samsung Electro-Mechanics", Строка для документации=https://www.samsungsem.com/resources/file/global/support/product_catalog/MLCC.pdf, Температурный диапазон="-55°C ~ 125°C", Тип элемента=Конденсатор, Точность=±0.25pF
C9: library part CC0603KRX7R9BB822, "Конденсатор", Артикул=CC0603KRX7R9BB822, Вид монтажа=SMD, Диэлектрик=X7R, Корпус="0603 (1608 Metric)", Напряжение=50V, Номинал=8.2nF, Описание="8200 pF ±10% 50V Ceramic Capacitor X7R 0603 (1608 Metric)", Производитель=YAGEO, Строка для документации=https://www.yageo.com/upload/media/product/productsearch/datasheet/mlcc/UPY-GPHC_X7R_6.3V-to-250V_23.pdf, Температурный диапазон="-55°C ~ 125°C", Тип элемента=Конденсатор, Точность=10%
C10 C13 C14: library part CL10A225KO8NNNC, "Конденсатор", Артикул=CL10A225KO8NNNC, Вид монтажа=SMD, Диэлектрик=X5R, Корпус="0603 (1608 Metric)", Напряжение=16V, Номинал=2.2uF, Описание="2.2 µF ±10% 16V Ceramic Capacitor X5R 0603 (1608 Metric)", Производитель="Samsung Electro-Mechanics", Строка для документации=https://mm.digikey.com/Volume0/opasdata/d220001/medias/docus/421/CL10A225KO8NNNC_Spec.pdf, Температурный диапазон="-55°C ~ 85°C", Тип элемента=Конденсатор, Точность=10%
C12 C25 C42 C49: library part CL10B103KB8NNNC, "Конденсатор", Артикул=CL10B103KB8NNNC, Вид монтажа=SMD, Диэлектрик=X7R, Корпус="0603 (1608 Metric)", Напряжение=16V, Номинал=10nF, Описание="10000 pF ±10% 50V Ceramic Capacitor X7R 0603 (1608 Metric)", Производитель="Samsung Electro-Mechanics", Строка для документации=https://mm.digikey.com/Volume0/opasdata/d220001/medias/docus/609/CL10B103KB8NNNC_Spec.pdf, Температурный диапазон="-55°C ~ 125°C", Тип элемента=Конденсатор, Точность=10%
C15 C16 C19 C20 C23: library part CL21B105KAFNNNE, "Конденсатор", Артикул=CL21B105KAFNNNE, Вид монтажа=SMD, Диэлектрик=X7R, Корпус="0805 (2012 Metric)", Напряжение=25V, Номинал=1uF, Описание="1 µF ±10% 25V Ceramic Capacitor X7R 0805 (2012 Metric)", Производитель="Samsung Electro-Mechanics", Строка для документации=https://mm.digikey.com/Volume0/opasdata/d220001/medias/docus/1105/CL21B105KAFNNNE_Spec.pdf, Тип элемента=Конденсатор, Точность=10%
C26 C40: library part CL10C101JB8NNNC, "Конденсатор", Артикул=CL10C101JB8NNNC, Вид монтажа=SMD, Диэлектрик=NP0, Корпус="0603 (1608 Metric)", Напряжение=50V, Номинал=100pF, Описание="100 pF ±5% 50V Ceramic Capacitor C0G, NP0 0603 (1608 Metric)", Производитель="Samsung Electro-Mechanics", Строка для документации=https://mm.digikey.com/Volume0/opasdata/d220001/medias/docus/609/CL10C101JB8NNNC_Spec.pdf, Температурный диапазон="-55°C ~ 125°C", Тип элемента=Конденсатор, Точность=5%
C27 C28 C29 C30 C31 C32 C33 C34 C35 C36 C37 C38 C44 C45 C46 C47: library part CL32B475KCVZW6E, "Конденсатор", Артикул=CL32B475KCVZW6E, Вид монтажа=SMD, Диэлектрик=X7R, Корпус="1210 (3225 Metric)", Напряжение=100V, Номинал=4.7uF, Описание="4.7 µF ±10% 100V Ceramic Capacitor X7R 1210 (3225 Metric)", Производитель="Samsung Electro-Mechanics", Строка для документации=https://www.samsungsem.com/resources/file/global/support/product_catalog/MLCC.pdf, Температурный диапазон="-55°C ~ 125°C", Тип элемента=Конденсатор, Точность=10%
C39 C43 C50: library part CL10B222KB8NNNC, "Конденсатор", Артикул=CL10B222KB8NNNC, Вид монтажа=SMD, Диэлектрик=X7R, Корпус="0603 (1608 Metric)", Напряжение=50V, Номинал=2.2nF, Описание="2200 pF ±10% 50V Ceramic Capacitor X7R 0603 (1608 Metric)", Производитель="Samsung Electro-Mechanics", Температурный диапазон="-55°C ~ 125°C", Тип элемента=Конденсатор, Точность=10%
DA1: "Микросхема понижающего преобразователя", Артикул=TPS54332DDAR, Вид монтажа=SMD, Корпус="8-PowerSOIC (0.154\", 3.90mm Width)", Описание="Buck Switching Regulator IC Positive Adjustable 0.8V 1 Output 3.5A 8-PowerSOIC (0.154\", 3.90mm Width)", Производитель="Texas Instruments", Строка для документации=https://www.ti.com/lit/ds/symlink/tps54332.pdf, Температурный диапазон="-40°C ~ 150°C (TJ)", Тип элемента=Микросхема
DA2: "Микросхема стабилизатор напряжения положительной полярности", Артикул=LP2985-33DBVR, Вид монтажа=SMD, Корпус=SOT-23-5, Описание="Linear Voltage Regulator IC Positive Fixed 1 Output 150mA SOT-23-5", Производитель="Texas Instruments", Строка для документации=https://www.ti.com/lit/ds/symlink/lp2985.pdf, Температурный диапазон="-40°C ~ 125°C", Тип элемента=Микросхема
DA3 DA4 DA5 DA6: "Микросхема драйвер затворов нижнего и верхнего ключа", Артикул=LM5109BMA/NOPB, Вид монтажа=SMD, Корпус="8-SOIC (0.154\", 3.90mm Width)", Описание="Half-Bridge Gate Driver IC Non-Inverting 8-SOIC", Производитель="Texas Instruments", Строка для документации=https://www.ti.com/lit/ds/symlink/lm5109b.pdf, Температурный диапазон="-40°C ~ 125°C (TJ)", Тип элемента=Микросхема
DA7: "Микросхема драйвер затвора нижнего ключа", Артикул=UCC27517DBVT, Вид монтажа=SMD, Корпус=SOT-23-5, Описание="Low-Side Gate Driver IC Inverting, Non-Inverting SOT-23-5", Производитель="Texas Instruments", Строка для документации=https://www.ti.com/lit/ds/symlink/ucc27517.pdf, Температурный диапазон="-40°C ~ 140°C (TJ)", Тип элемента=Микросхема
DA8 DA9 DA10: "Микросхема усилитель сигнала токового шунта", Артикул=INA240A1D, Вид монтажа=SMD, Корпус="8-SOIC (0.154\", 3.90mm Width)", Описание="Current Sense Amplifier 1 Circuit 8-SOIC", Производитель="Texas Instruments", Строка для документации=https://www.ti.com/lit/ds/symlink/ina240.pdf, Температурный диапазон="-40°C ~ 125°C", Тип элемента=Микросхема
DD1: "Микросхема EEPROM с I2C интерфейсом", Артикул=M24C01-WMN6P, Вид монтажа=SMD, Корпус="8-SOIC (0.154\", 3.90mm Width)", Описание="EEPROM Memory IC 1Kbit I2C 400 kHz 900 ns 8-SOIC", Производитель=STMicroelectronics, Строка для документации=https://www.st.com/content/ccc/resource/technical/document/datasheet/b0/d8/50/40/5a/85/49/6f/DM00071904.pdf/files/DM00071904.pdf/jcr:content/translations/en.DM00071904.pdf, Температурный диапазон="-40°C ~ 85°C (TA)", Тип элемента=Микросхема
FU1: library part 0154010.DR, "Плавкий предохранитель", Артикул=0154010.DR, Вид монтажа=SMD, Корпус="9.73mm x 5.03mm x 3.81mm", Описание="10 A 125 V AC 125 V DC Fuse Board Mount (Cartridge Style Excluded) Requires Holder, Surface Mount 2-SMD, Square End Block with Holder", Производитель="Littelfuse Inc.", Строка для документации=https://www.littelfuse.com/~/media/electronics/datasheets/fuses/littelfuse_fuse_154_154t_154l_154tl_datasheet.pdf.pdf, Температурный диапазон="-55°C ~ 125°C", Тип="Fuse Holder Assembly", Тип элемента=Предохранитель, Ток=10A
HL1 HL2 HL3: "Светодиод", Артикул=GNL-0603GC, Вид монтажа=SMD, Длина волны=567nm, Корпус="0603 (1608 Metric)", Напряжение=2V, Описание="Green 567nm LED Indication - Discrete 2V 0603 (1608 Metric)", Производитель="G-nor Electronics", Прямой ток=20mA, Строка для документации=https://www.g-nor.com/Uploads/Ed/file/20210517/1621223120713818.doc, Температурный диапазон="-40°C ~ 80°C", Тип элемента=Диод, Цвет=Зеленый, Яркость=LED
L1: library part SRN8040-150M, "Дроссель с магнитопроводом", Артикул=SRN8040-150M, Вид монтажа=SMD, Корпус="8.00mm x 8.00mm", Номинал=15uH, Описание="15 µH Semi-Shielded Drum Core, Wirewound Inductor 2.4 A 70mOhm Max Nonstandard", Производитель="Bourns Inc.", Сопротивление=70m, Строка для документации=https://www.bourns.com/docs/Product-Datasheets/SRN8040.pdf, Температурный диапазон="-40°C ~ 125°C", Тип элемента=Дроссель, Ток насыщения=2.7A, Ток номинальный=2.4A, Точность=20%
L2 L3 L4 L5: library part BLM18AG601SN1D, "Фильтр ЭМП индуктивный", Артикул=BLM18AG601SN1D, Вид монтажа=SMD, Корпус="0603 (1608 Metric)", Номинал="600 @ 100MHz", Описание="600 Ohms @ 100 MHz 1 Ferrite Bead 0603 (1608 Metric) 500mA 380mOhm", Производитель="Murata Electronics", Сопротивление=380m, Строка для документации=https://www.murata.com/en-us/products/productdata/8796738650142/ENFA0003.pdf, Температурный диапазон="-55°C ~ 125°C", Тип="Ferrite Bead", Тип элемента="Фильтр ЭМП", Ток=500mA
MH1 MH2 MH3 MH4: library part "Mounting Hole, 3.2mm/5.4mm, plated, with via stiching", "Монтажное отверстие, металлизированное", Артикул="Mounting Hole, 3.2mm/5.4mm, plated, with via stiching", Описание="Mounting Hole, 3.2mm/5.4mm , plated, with via stiching", Тип="Mounting Hole", Тип элемента=Механический
NT1 NT2 NT3 NT4 NT5 NT6: library part "Net Tie, 0.125mm width, 0.375mm length", "Соединитель цепей (Net Tie)", Артикул="Net Tie, 0.125mm width, 0.375mm length", Описание="Net Tie, 0.125mm width, 0.375mm length", Тип="Net Tie", Тип элемента=Другое
R1: library part RC0603FR-07332KL, "Резистор", Артикул=RC0603FR-07332KL, Вид монтажа=SMD, Корпус="0603 (1608 Metric)", Напряжение=75V, Номинал=332k, Описание="332 kOhms ±1% 0.1W, 1/10W Chip Resistor 0603 (1608 Metric) Moisture Resistant Thick Film", Производитель=YAGEO, Строка для документации=https://www.yageo.com/upload/media/product/app/datasheet/rchip/pyu-rc_group_51_rohs_l.pdf, Температурный диапазон="-55°C ~ 155°C", Тип элемента=Резистор, ТКС=±100ppm/°C, Точность=1%
R2: library part RC0603FR-0710K2L, "Резистор", Артикул=RC0603FR-0710K2L, Вид монтажа=SMD, Корпус="0603 (1608 Metric)", Напряжение=75V, Номинал=10.2k, Описание="10.2 kOhms ±1% 0.1W, 1/10W Chip Resistor 0603 (1608 Metric) Moisture Resistant Thick Film", Производитель=YAGEO, Строка для документации=https://www.yageo.com/upload/media/product/app/datasheet/rchip/pyu-rc_group_51_rohs_l.pdf, Температурный диапазон="-55°C ~ 155°C", Тип элемента=Резистор, ТКС=±100ppm/°C, Точность=1%
R3: library part RC0603FR-079K31L, "Резистор", Артикул=RC0603FR-079K31L, Вид монтажа=SMD, Корпус="0603 (1608 Metric)", Напряжение=75V, Номинал=9.31k, Описание="9.31 kOhms ±1% 0.1W, 1/10W Chip Resistor 0603 (1608 Metric) Moisture Resistant Thick Film", Производитель=YAGEO, Строка для документации=https://www.yageo.com/upload/media/product/app/datasheet/rchip/pyu-rc_group_51_rohs_l.pdf, Температурный диапазон="-55°C ~ 155°C", Тип элемента=Резистор, ТКС=±100ppm/°C, Точность=1%
R4: library part RC0603FR-0731K6L, "Резистор", Артикул=RC0603FR-0731K6L, Вид монтажа=SMD, Корпус="0603 (1608 Metric)", Напряжение=75V, Номинал=31.6k, Описание="31.6 kOhms ±1% 0.1W, 1/10W Chip Resistor 0603 (1608 Metric) Moisture Resistant Thick Film", Производитель=YAGEO, Строка для документации=https://www.yageo.com/upload/media/product/app/datasheet/rchip/pyu-rc_group_51_rohs_l.pdf, Температурный диапазон="-55°C ~ 155°C", Тип элемента=Резистор, ТКС=±100ppm/°C, Точность=1%
R5: library part RC0603FR-07732RL, "Резистор", Артикул=RC0603FR-07732RL, Вид монтажа=SMD, Корпус="0603 (1608 Metric)", Напряжение=75V, Номинал=732, Описание="732 kOhms ±1% 0.1W, 1/10W Chip Resistor 0603 (1608 Metric) Moisture Resistant Thick Film", Производитель=YAGEO, Строка для документации=https://www.yageo.com/upload/media/product/app/datasheet/rchip/pyu-rc_group_51_rohs_l.pdf, Температурный диапазон="-55°C ~ 155°C", Тип элемента=Резистор, ТКС=±100ppm/°C, Точность=1%
R6 R9 R38 R40 R41: library part RC0603FR-071KL, "Резистор", Артикул=RC0603FR-071KL, Вид монтажа=SMD, Корпус="0603 (1608 Metric)", Напряжение=75V, Номинал=1k, Описание="1 kOhms ±1% 0.1W, 1/10W Chip Resistor 0603 (1608 Metric) Moisture Resistant Thick Film", Производитель=YAGEO, Строка для документации=https://www.yageo.com/upload/media/product/app/datasheet/rchip/pyu-rc_group_51_rohs_l.pdf, Температурный диапазон="-55°C ~ 155°C", Тип элемента=Резистор, ТКС=±100ppm/°C, Точность=1%
R7 R10: library part RC0603FR-0722KL, "Резистор", Артикул=RC0603FR-0722KL, Вид монтажа=SMD, Корпус="0603 (1608 Metric)", Напряжение=75V, Номинал=22k, Описание="22 kOhms ±1% 0.1W, 1/10W Chip Resistor 0603 (1608 Metric) Moisture Resistant Thick Film", Производитель=YAGEO, Строка для документации=https://www.yageo.com/upload/media/product/app/datasheet/rchip/pyu-rc_group_51_rohs_l.pdf, Температурный диапазон="-55°C ~ 155°C", Тип элемента=Резистор, ТКС=±100ppm/°C, Точность=1%
R8 R17 R18 R19 R20 R27 R28 R29 R30 R32 R49 R50: library part RC0603FR-0710KL, "Резистор", Артикул=RC0603FR-0710KL, Вид монтажа=SMD, Корпус="0603 (1608 Metric)", Напряжение=75V, Номинал=10k, Описание="10 kOhms ±1% 0.1W, 1/10W Chip Resistor 0603 (1608 Metric) Moisture Resistant Thick Film", Производитель=YAGEO, Строка для документации=https://www.yageo.com/upload/media/product/app/datasheet/rchip/pyu-rc_group_51_rohs_l.pdf, Температурный диапазон="-55°C ~ 155°C", Тип элемента=Резистор, ТКС=±100ppm/°C, Точность=1%
R11 R12 R13 R14 R15 R16 R21 R22 R23 R24 R25 R26 R31: library part RC0603FR-072R2L, "Резистор", Артикул=RC0603FR-072R2L, Вид монтажа=SMD, Корпус="0603 (1608 Metric)", Напряжение=75V, Номинал=2.2, Описание="2.2 Ohms ±1% 0.1W, 1/10W Chip Resistor 0603 (1608 Metric) Moisture Resistant Thick Film", Производитель=YAGEO, Строка для документации=https://www.yageo.com/upload/media/product/app/datasheet/rchip/pyu-rc_group_51_rohs_l.pdf, Температурный диапазон="-55°C ~ 155°C", Тип элемента=Резистор, ТКС=±100ppm/°C, Точность=1%
R37 R39: library part RC0603FR-07100RL, "Резистор", Артикул=RC0603FR-07100RL, Вид монтажа=SMD, Корпус="0603 (1608 Metric)", Напряжение=75V, Номинал=100, Описание="100 Ohms ±1% 0.1W, 1/10W Chip Resistor 0603 (1608 Metric) Moisture Resistant Thick Film", Производитель=YAGEO, Строка для документации=https://www.yageo.com/upload/media/product/app/datasheet/rchip/pyu-rc_group_51_rohs_l.pdf, Температурный диапазон="-55°C ~ 155°C", Тип элемента=Резистор, ТКС=±100ppm/°C, Точность=1%
R42 R43 R44 R45 R46 R47: library part CRA2512-FZ-R015ELF, "Резистор", Артикул=CRA2512-FZ-R015ELF, Вид монтажа=SMD, Корпус="2512 (6432 Metric)", Номинал=15m, Описание="15 mOhms ±1% 3W Chip Resistor 2512 (6432 Metric) Automotive AEC-Q200, Current Sense, Moisture Resistant Metal Element", Производитель="Bourns Inc.", Строка для документации=https://www.bourns.com/docs/product-datasheets/cra.pdf, Температурный диапазон="-55°C ~ 170°C", Тип элемента=Резистор, ТКС=±50ppm/°C, Точность=1%
R48: library part NCP18XH103F03RB, "Резистор", Артикул=NCP18XH103F03RB, Вид монтажа=SMD, Корпус="0603 (1608 Metric)", Номинал=10k, Описание="NTC Thermistor 10k 0603 (1608 Metric)", Производитель="Murata Electronics", Строка для документации=https://www.murata.com/en-us/api/pdfdownloadapi?cate=luNTCforTempeSenso&partno=NCP18XH103F03RB, Температурный диапазон="-40°C ~ 125°C", Тип элемента=Резистор, Точность=1%
VD1 VD3 VD4 VD5 VD6 VD12: "Диод Шоттки", Вид монтажа=SMD, Тип=Schottky, Тип элемента=Диод
  VD1: Артикул=B340A-13-F, Корпус="DO-214AC, SMA", Напряжение=40V, Описание="Diode 40 V 3A Surface Mount SMA", Производитель="Diodes Incorporated", Прямой ток=3A, Строка для документации=https://www.diodes.com/assets/Datasheets/ds30891.pdf, Температурный диапазон="-55°C ~ 150°C"
  VD3 VD4 VD5 VD6: Артикул=PMEG10010ELRX, Корпус=SOD-123W, Напряжение=100V, Описание="Diode 100 V 1A Surface Mount SOD-123W", Производитель="Nexperia USA Inc.", Прямой ток=1A, Строка для документации=https://assets.nexperia.com/documents/data-sheet/PMEG10010ELR.pdf, Температурный диапазон="-40°C ~ 175°C"
  VD12: Артикул=B3100-13-F, Корпус="DO-214AB, SMC", Напряжение=100V, Описание="Diode 100 V 3A Surface Mount SMC", Производитель="Diodes Incorporated", Прямой ток=3A, Строка для документации=https://mm.digikey.com/Volume0/opasdata/d220001/medias/docus/797/B370-B3100.pdf, Температурный диапазон="-55°C ~ 125°C"
VD2 VD8 VD9 VD10 VD11: "Стабилитрон", Вид монтажа=SMD, Температурный диапазон="-65°C ~ 150°C", Тип=Zener, Тип элемента=Диод
  VD2: Артикул=MMSZ5230B-7-F, Корпус=SOD-123, Напряжение=4.7V, Описание="Zener Diode 4.7 V 500 mW ±5% Surface Mount SOD-123", Производитель="Diodes Incorporated", Прямой ток=20mA, Строка для документации=https://www.diodes.com/assets/Datasheets/ds18010.pdf
  VD8 VD9 VD10 VD11: Артикул=BZX384-B13,115, Корпус=SOD-323, Напряжение=13V, Описание="Zener Diode 13 V 300 mW ±2% Surface Mount SOD-323", Производитель="Nexperia USA Inc.", Прямой ток=5mA, Строка для документации=https://assets.nexperia.com/documents/data-sheet/BZX384_SER.pdf
VD7: "TVS диод однонаправлвенный", Артикул=SM15T68A, Вид монтажа=SMD, Корпус="DO-214AB, SMC", Напряжение=58.1V, Напряжение ограничения=121V, Напряжение пробоя=64.6V, Описание="121V Clamp 83A (8/20µs) Ipp Tvs Diode Surface Mount SMC", Производитель=STMicroelectronics, Строка для документации=https://www.st.com/content/ccc/resource/technical/document/datasheet/a5/63/bb/0d/f0/b8/44/65/CD00000724.pdf/files/CD00000724.pdf/jcr:content/translations/en.CD00000724.pdf, Температурный диапазон="-55°C ~ 150°C (TJ)", Тип="TVS Unidirectional", Тип элемента="Диод защитный", Ток=83A
VT1 VT2 VT3 VT4 VT5 VT6 VT7 VT8 VT9: "МОП транзистор, N-канальный", Артикул=BSC030N08NS5ATMA1, Вид монтажа=SMD, Корпус=PG-TDSON-8, Напряжение=80V, Описание="N-Channel 80 V 100A (Tc) 2.5W (Ta), 139W (Tc) Surface Mount PG-TDSON-8-7", Пороговое напряжение=3V, Производитель="Infineon Technologies", Сопротивление канала=3m, Строка для документации=https://www.infineon.com/dgdl/Infineon-BSC030N08NS5-DS-v02_02-EN.pdf?fileId=5546d4624ad04ef9014aed52f4210acf, Температурный диапазон="-55°C ~ 150°C (TJ)", Тип=N-MOSFET, Тип элемента="Транзистор полевой", Ток="100A (Tc)"
X1 X5: "Разъем, 30 контактов", Вид монтажа="Through Hole", Количество контактов=30, Напряжение=250V, Описание="Connector Header Through Hole 30 position 0.100\" (2.54mm)", Производитель="Connfly electronic (Zhenqin)", Температурный диапазон="-40°C ~ 105°C", Тип разъема="Header, Male Pin", Тип элемента=Разъем, Ток=3A, Шаг контактов=2.54mm
  X1: Артикул=DS1013-30S, Строка для документации=http://cn.connfly.group/static/upload/file/pdf/DS1013.pdf
  X5: Артикул=DS1021-2X15SF11-B, Строка для документации=http://cn.connfly.group/static/upload/file/pdf/DS1021.pdf
X2: "Разъем, 5 контактов", Артикул=2EDGR-5.0-05P-14-00A(H), Вид монтажа="Through Hole", Количество контактов=5, Напряжение=320V, Описание="Pluggable terminal block; 5.0mm; ways: 5; angled 90; socket; male", Производитель="Degson Electronics", Строка для документации=https://www.tme.eu/Document/aee9e19a2094185fa8ff38cbebedb2f3/2EDGR-5.0.pdf, Температурный диапазон="-40°C ~ 105°C", Тип разъема="Pluggable terminal block", Тип элемента=Разъем, Ток=20A, Шаг контактов=5mm
X3: "Разъем, 4 контакта", Артикул=2EDGR-5.0-04P-14-00A(H), Вид монтажа="Through Hole", Количество контактов=4, Напряжение=320V, Описание="Pluggable terminal block; 5.0mm; ways: 4; angled 90; socket; male", Производитель="Degson Electronics", Строка для документации=https://www.tme.eu/Document/aee9e19a2094185fa8ff38cbebedb2f3/2EDGR-5.0.pdf, Температурный диапазон="-40°C ~ 105°C", Тип разъема="Pluggable terminal block", Тип элемента=Разъем, Ток=20A, Шаг контактов=5mm
X4: "Разъем, 2 контакта", Артикул=B2B-XH-A(LF)(SN), Вид монтажа="Through Hole", Количество контактов=2, Напряжение=250V, Описание="Connector Header Through Hole 2 position 0.098\" (2.50mm)", Производитель="JST Sales America Inc.", Строка для документации=https://www.jst-mfg.com/product/pdf/eng/eXH.pdf, Температурный диапазон="-25°C ~ 85°C", Тип разъема="Header, Male Pin", Тип элемента=Разъем, Ток=3A, Шаг контактов=2.5mm

## Via types
v1: diameter 0.6, hole 0.3, Top Layer to Bottom Layer, tented both sides, 789 vias
v2: diameter 0.7, hole 0.4, Top Layer to Bottom Layer, tented both sides, 94 vias
v3: diameter 0.6, hole 0.3, Top Layer to Bottom Layer, 48 vias

## Nets (pads, with @x,y where several pads share a name; then routed paths per layer and width w, separated by ;. In a path a pad name is that pad's centre, name@x,y a point inside that pad or via, vN(x,y) a via of type N, cw(c..) or ccw(c..) an arc to the next point about the centre after c; other vN are vias at no path point)
+3.3V: C4.2 C14.2 DD1.8 HL1.2 L2.2 L3.1 L4.1 L5.1 R48.1 X4.1 | length 30.2
  Top Layer w0.125: v1(20.875,36.375) R48.1@20.875,37.275
  Top Layer w0.45: L4.1@1.375,54.275 v1(1.375,55.175) ; v1(1.375,57.8) HL1.2@1.375,58.7 ; L5.1@23.3,54.275 v1(23.3,55.175) ; v1(23.525,61.1) L2.2@23.525,62 C14.2@25.125,62 v1(25.125,61.1) ; DD1.8@31.63,62.65 C4.2@33.2,62.65 v1(33.2,61.75) ; v1(35.7,58.425) L3.1@35.7,59.325
  Bottom Layer w0.125: v1(20.875,36.375) 21.975,37.475 21.975,48.075 23.3,49.4 v1(23.3,55.175)
+5V: C10.2 DA2.1 DA2.3 X1.4 X5.4 | length 6.7
  Top Layer w0.45: v1(18.025,67.55) C10.2@18.025,66.65 19.15,65.525 21.25,65.525 21.525,65.8 DA2.1@21.525,66.65 ; DA2.3@19.625,66.65 v1(19.625,67.55)
+24V: C5.2 C6.2 DA1.2 R1.1 X1.7 X5.7 | length 0.9
  Top Layer w0.45: v1(62.725,56.4) R1.1@62.725,57.3
  other v1: 56.4,50.3 57.15,50.3 57.9,50.3 58.65,50.3 59.4,50.3
+PWR_VIN: FU1.2 X2.5
  other v1: 51.35,8.7 52.35,8.7 53.35,8.7 55.475,8.775 50.55,9.5 54.15,9.5 56.225,9.525 58.475,9.525 60.725,9.525 62.975,9.525 55.475,10.275 57.725,10.275 59.975,10.275 62.225,10.275 50.55,10.5 54.15,10.5 56.225,11.025 58.475,11.025 60.725,11.025 62.975,11.025 50.55,11.5 54.15,11.5 55.475,11.775 57.725,11.775 59.975,11.775 62.225,11.775 56.225,12.525 58.475,12.525 60.725,12.525 62.975,12.525
BR_RES: VD12.2 VT9.5 VT9.6 VT9.7 VT9.8 X2.2
  other v1: 36.35,8.7 37.35,8.7 38.35,8.7 35.55,9.5 39.15,9.5 35.55,10.5 39.15,10.5 35.55,11.5 39.15,11.5 40.775,13.925 41.525,13.925 42.275,13.925 43.025,13.925 43.775,13.925 44.525,13.925
  other v2: 42.025,14.95 43.275,14.95 44.525,14.95 42.025,16.175 43.275,16.175 44.525,16.175 42.025,17.425 43.275,17.425 44.525,17.425 42.025,18.65 43.275,18.65 44.525,18.65
BRAKE: DA7.3 R32.1 X1.20 X5.20 | length 35
  Top Layer w0.125: v1(44.975,71.6) 44.975,60.85 44.425,60.3 44.425,54.975 R32.1@45.225,54.175 DA7.3@45.225,52.425
  Bottom Layer w0.125: X1.20@37.08,76.07 38.36,77.35 45.45,77.35 46,76.8 46,72.625 v1(44.975,71.6)
COMMON_BUS: C44.1 C45.1 C46.1 C47.1 NT1.2 R43.1 R44.1 VT5.1 VT5.2 VT5.3 VT6.1 VT6.2 VT6.3 VT7.1 VT7.2 VT7.3 VT8.1 VT8.2 VT8.3 | length 4.9
  Top Layer w0.6: R44.1@41.075,30.65 41.075,28.425 v1(43.4,28.425)
  Bottom Layer w0.125: v1(43.4,28.425) NT1.2@43.65,28.675
  other v1: 10.775,22.85 19.825,22.85 28.875,22.85 37.925,22.85 10.775,23.6 19.825,23.6 28.875,23.6 37.925,23.6 39.5,23.6 40.25,23.6 41,23.6 41.75,23.6 42.5,23.6 10.775,24.35 19.825,24.35 28.875,24.35 37.925,24.35 39.5,24.35 10.775,25.1 19.825,25.1 28.875,25.1 37.925,25.1 39.5,25.1 10.775,25.85 19.825,25.85 28.875,25.85 37.925,25.85 39.5,25.85 10.775,26.6 19.825,26.6 28.875,26.6 37.925,26.6 39.5,26.6 10.775,27.35 19.825,27.35 28.875,27.35 37.925,27.35 39.5,27.35 10.775,28.1 19.825,28.1 28.875,28.1 37.925,28.1 39.5,28.1 9.3,29.075 10.45,29.075 11.6,29.075 18.35,29.075 19.5,29.075 20.65,29.075 27.4,29.075 28.55,29.075 29.7,29.075 36.45,29.075 37.6,29.075 38.75,29.075 9.875,29.55 11.025,29.55 12.175,29.55 18.925,29.55 20.075,29.55 21.225,29.55 27.975,29.55 29.125,29.55 30.275,29.55 37.025,29.55 38.175,29.55 39.325,29.55
DRV_EN: X1.21 X5.21
EEPROM_A0: DD1.1 X1.18 X5.18 | length 9.2
  Top Layer w0.125: DD1.1@31.63,68.05 31.63,71.18 33.3,72.85 33.3,74.83 X1.18@34.54,76.07
EEPROM_A1: DD1.2 X1.17 X5.17 | length 11.2
  Top Layer w0.125: DD1.2@30.36,68.05 30.36,66.771 30.506,66.625 32.5,66.625 32.647,66.771 32.647,71.637 X1.17@34.54,73.53
EEPROM_SCL: DD1.6 X1.14 X5.14 | length 14.6
  Top Layer w0.125: v1(27.825,65.375) 29.09,64.11 DD1.6@29.09,62.65
  Bottom Layer w0.125: v1(27.825,65.375) 28.325,65.875 28.325,74.935 X1.14@29.46,76.07
EEPROM_SDA: DD1.5 X1.15 X5.15 | length 12.6
  Top Layer w0.125: v1(27.82,63.895) DD1.5@27.82,62.65 DD1.5@27.825,62.655
  Bottom Layer w0.125: v1(27.82,63.895) 28.575,64.65 28.575,65.771 28.575,70.105 X1.15@32,73.53
GATE_BRAKE: R31.1 VT9.4 | length 29.2
  Top Layer w0.25: v1(45.9,18.705) VT9.4@46.863,18.705
  Top Layer w0.45: v1(47.106,45.575) R31.1@47.106,46.475
  Bottom Layer w0.45: v1(45.9,18.705) 45.9,44.369 v1(47.106,45.575)
GATE_UX1_H: R13.1 VD8.1 VT1.4 | length 15.5
  Top Layer w0.25: VT1.4@8.405,33.412 8.41,33.407 v1@8.41,32.439 ; VD8.1@8.41,31.55 8.415,31.555 v1(8.415,32.439)
  Top Layer w0.45: v1(10.65,44.2) R13.1@10.65,45.1
  Bottom Layer w0.45: v1(8.415,32.439) 8.415,33.34 10.65,35.575 v1(10.65,44.2)
GATE_UX1_L: R15.1 VT5.4 | length 20.5
  Top Layer w0.25: v1(8.695,27) VT5.4@9.658,27 ; VT5.4@9.663,27.005 VT5.4@9.675,27.017
  Top Layer w0.45: v1(8.1,44.2) R15.1@8.1,45.1
  Bottom Layer w0.45: v1(8.1,44.2) 7.15,43.25 7.15,35.55 6.725,35.125 6.725,28.97 v1(8.695,27)
GATE_VX2_H: R23.1 VD10.1 VT3.4 | length 14.8
  Top Layer w0.25: VT3.4@17.455,33.412 17.46,33.407 v1@17.46,32.439 ; VD10.1@17.46,31.55 17.465,31.555 v1(17.465,32.439)
  Top Layer w0.45: v1(18.175,44.2) R23.1@18.175,45.1
  Bottom Layer w0.45: v1(17.465,32.439) 18.175,33.149 v1(18.175,44.2)
GATE_VX2_L: R25.1 VT7.4 | length 19.9
  Top Layer w0.25: v1(17.75,27.005) VT7.4@18.713,27.005
  Top Layer w0.45: v1(15.65,44.2) R25.1@15.65,45.1
  Bottom Layer w0.45: v1(15.65,44.2) 15.65,29.105 v1(17.75,27.005)
GATE_WY1_H: R14.1 VD9.1 VT2.4 | length 17
  Top Layer w0.25: v1@26.505,32.444 VT2.4@26.505,33.412 VT2.4@26.51,33.407 ; VD9.1@26.51,31.56 v1(26.51,32.444)
  Top Layer w0.45: v1(32.55,44.2) R14.1@32.55,45.1
  Bottom Layer w0.45: v1(26.51,32.444) 29.825,35.759 29.825,41.475 v1(32.55,44.2)
GATE_WY1_L: R16.1 VT6.4 | length 22
  Top Layer w0.25: v1(26.8,27.005) VT6.4@27.763,27.005
  Top Layer w0.45: v1(30.025,44.2) R16.1@30.025,45.1
  Bottom Layer w0.45: v1(26.8,27.005) 24.825,28.98 24.825,32.825 28.175,36.175 28.175,42.35 v1(30.025,44.2)
GATE_Y2_H: R24.1 VD11.1 VT4.4 | length 16.4
  Top Layer w0.25: v1@35.555,32.444 VT4.4@35.555,33.412 VT4.4@35.56,33.407 ; VD11.1@35.56,31.56 v1(35.56,32.444)
  Top Layer w0.45: v1(40.1,44.2) R24.1@40.1,45.1
  Bottom Layer w0.45: v1(35.56,32.444) 40.1,36.984 v1(40.1,44.2)
GATE_Y2_L: R26.1 VT8.4 | length 21.3
  Top Layer w0.25: v1(35.85,27.005) VT8.4@36.813,27.005
  Top Layer w0.45: v1(37.575,44.2) R26.1@37.575,45.1
  Bottom Layer w0.45: v1(35.85,27.005) 33.975,28.88 33.975,33.075 37.575,36.675 v1(37.575,44.2)
GND: C2.2 C3.1 C4.1 C5.1 C6.1 C7.1 C8.1 C9.1 C10.1 C11.1 C12.1 C13.1 C14.1 C15.2 C16.2 C19.2 C20.2 C23.2 C24.1 C25.1 C26.2 C27.1 C28.1 C29.1 C30.1 C31.1 C32.1 C33.1 C34.1 C35.1 C36.1 C37.1 C38.1 C39.1 C40.1 C41.1 C42.1 C43.1 C48.1 C49.1 C50.1 C51.2 C52.2 DA1.7 DA1.9 DA2.2 DA3.4 DA4.4 DA5.4 DA6.4 DA7.2 DA7.4 DA8.2 DA8.3 DA9.2 DA9.3 DA10.2 DA10.3 DD1.3 DD1.4 DD1.7 MH1.1 MH2.1 MH3.1 MH4.1 NT4.2 R4.2 R5.2 R6.2 R8.2 R9.2 R10.2 R17.2 R18.2 R19.2 R20.2 R27.2 R28.2 R29.2 R30.2 R32.2 R43.2 R44.2 R49.2 R50.2 VD1.2 VD2.2 VD7.2 VT9.1 VT9.2 VT9.3 X1.1 X1.10 X1.13 X1.16 X1.19 X1.23 X1.25 X1.27 X2.3 X2.4 X5.1 X5.10 X5.13 X5.16 X5.19 X5.23 X5.25 X5.27 | length 70.2
  Top Layer w0.45: C42.1@2.975,54.275 v1(2.975,55.175) ; v1(2.975,57.8) R6.2@2.975,58.7 ; DA9.2@3.315,45.15 v1(3.315,46.395) ; C41.1@4.575,54.275 v1(4.575,55.175) ; DA9.3@4.585,45.15 v1(4.585,46.395) ; C43.1@6.175,57.325 v1(6.175,58.225) ; R17.2@7.775,57.325 v1(7.775,58.225) ; v1(8.095,52.58) DA3.4@8.095,53.825 ; R18.2@9.375,57.325 v1(9.375,58.225) ; R27.2@15.375,57.325 v1(15.375,58.225) ; v1(15.645,52.58) DA5.4@15.645,53.825 ; R28.2@16.975,57.325 v1(16.975,58.225) ; v1(17.125,65.05) C10.1@18.025,65.05 ; v1(18.025,61.1) C12.1@18.025,62 ; DA2.2@20.575,66.65 v1(20.575,67.55) ; C13.1@23.525,66.65 v1(23.525,67.55) ; C49.1@24.9,54.275 v1(24.9,55.175) ; C14.1@25.125,63.6 v1(25.125,64.5) ; DA10.2@25.24,45.15 v1(25.24,46.395) ; C48.1@26.5,54.275 v1(26.5,55.175) ; DA10.3@26.51,45.15 v1(26.51,46.395) ; DD1.4@27.82,68.05 v1(27.82,69.295) ; C50.1@28.1,57.325 v1(28.1,58.225) ; DD1.3@29.09,68.05 v1(29.09,69.295) ; R19.2@29.7,57.325 v1(29.7,58.225) ; v1(30.02,52.58) DA4.4@30.02,53.825 ; v1(30.36,61.405) DD1.7@30.36,62.65 ; R20.2@31.3,57.325 v1(31.3,58.225) ; C4.1@33.2,64.25 v1(33.2,65.15) ; C39.1@34.8,67.3 v1(34.8,68.2) ; v1(36.4,57.325) R29.2@37.3,57.325 R30.2@38.9,57.325 ; v1(37.3,58.425) C24.1@37.3,59.325 ; v1(37.57,52.58) DA6.4@37.57,53.825 ; v1(37.64,66.805) DA8.3@37.64,68.05 ; v1(38.9,58.425) C25.1@38.9,59.325 ; v1(38.91,66.805) DA8.2@38.91,68.05 ; C26.2@43.475,62.65 v1(44.375,62.65) ; C40.1@43.475,68.05 v1(44.375,68.05) ; v1(45.225,48.925) DA7.4@45.225,49.825 ; R32.2@45.225,55.775 v1(45.225,56.675) ; DA7.2@46.175,52.425 v1(46.175,53.325) ; v1(49.175,45.575) R8.2@49.175,46.475 ; VD2.2@51.75,48.925 v1(51.75,49.825) ; R9.2@53.475,48.075 v1(53.475,48.975) ; C11.1@55.075,48.075 v1(55.075,48.975) ; v1(56.65,66.55) C51.2@56.65,67.45 ; v1(58.25,66.55) R49.2@58.25,67.45 ; R5.2@59.85,64.775 v1(59.85,65.675) ; v1(59.85,66.55) R50.2@59.85,67.45 ; v1(59.875,45.575) R10.2@59.875,46.475 ; C9.1@61.1,55.85 58.725,55.85 v1(57.625,56.95) 57.975,57.3 R4.2@61.1,57.3 ; v1(61.45,66.55) C52.2@61.45,67.45
  Top Layer w0.6: v1(44.15,28.425) 46.475,28.425 R44.2@46.475,30.65 ; C8.1@56.65,61.65 C7.1@56.65,63.175 ; C8.1@56.675,61.65 56.675,60.975 56.99,60.66 DA1.9@56.99,57.585
  Bottom Layer w0.125: NT4.2@43.9,28.675 v1(44.15,28.425)